# Altium PCB ADCS C2Sv0.1.PcbDoc (part 1 of 3)
Units mm, origin at the board's own origin, x right, y up, seen from the top; angles counter-clockwise.
Board outline 90 x 68 mm, 6 copper layers (SIG 1, GND 1, SIG 2, PWR, GND 2, SIG 3), stack 1.597 mm thick; 158 components, 104 nets, 588 pads, 339 vias.
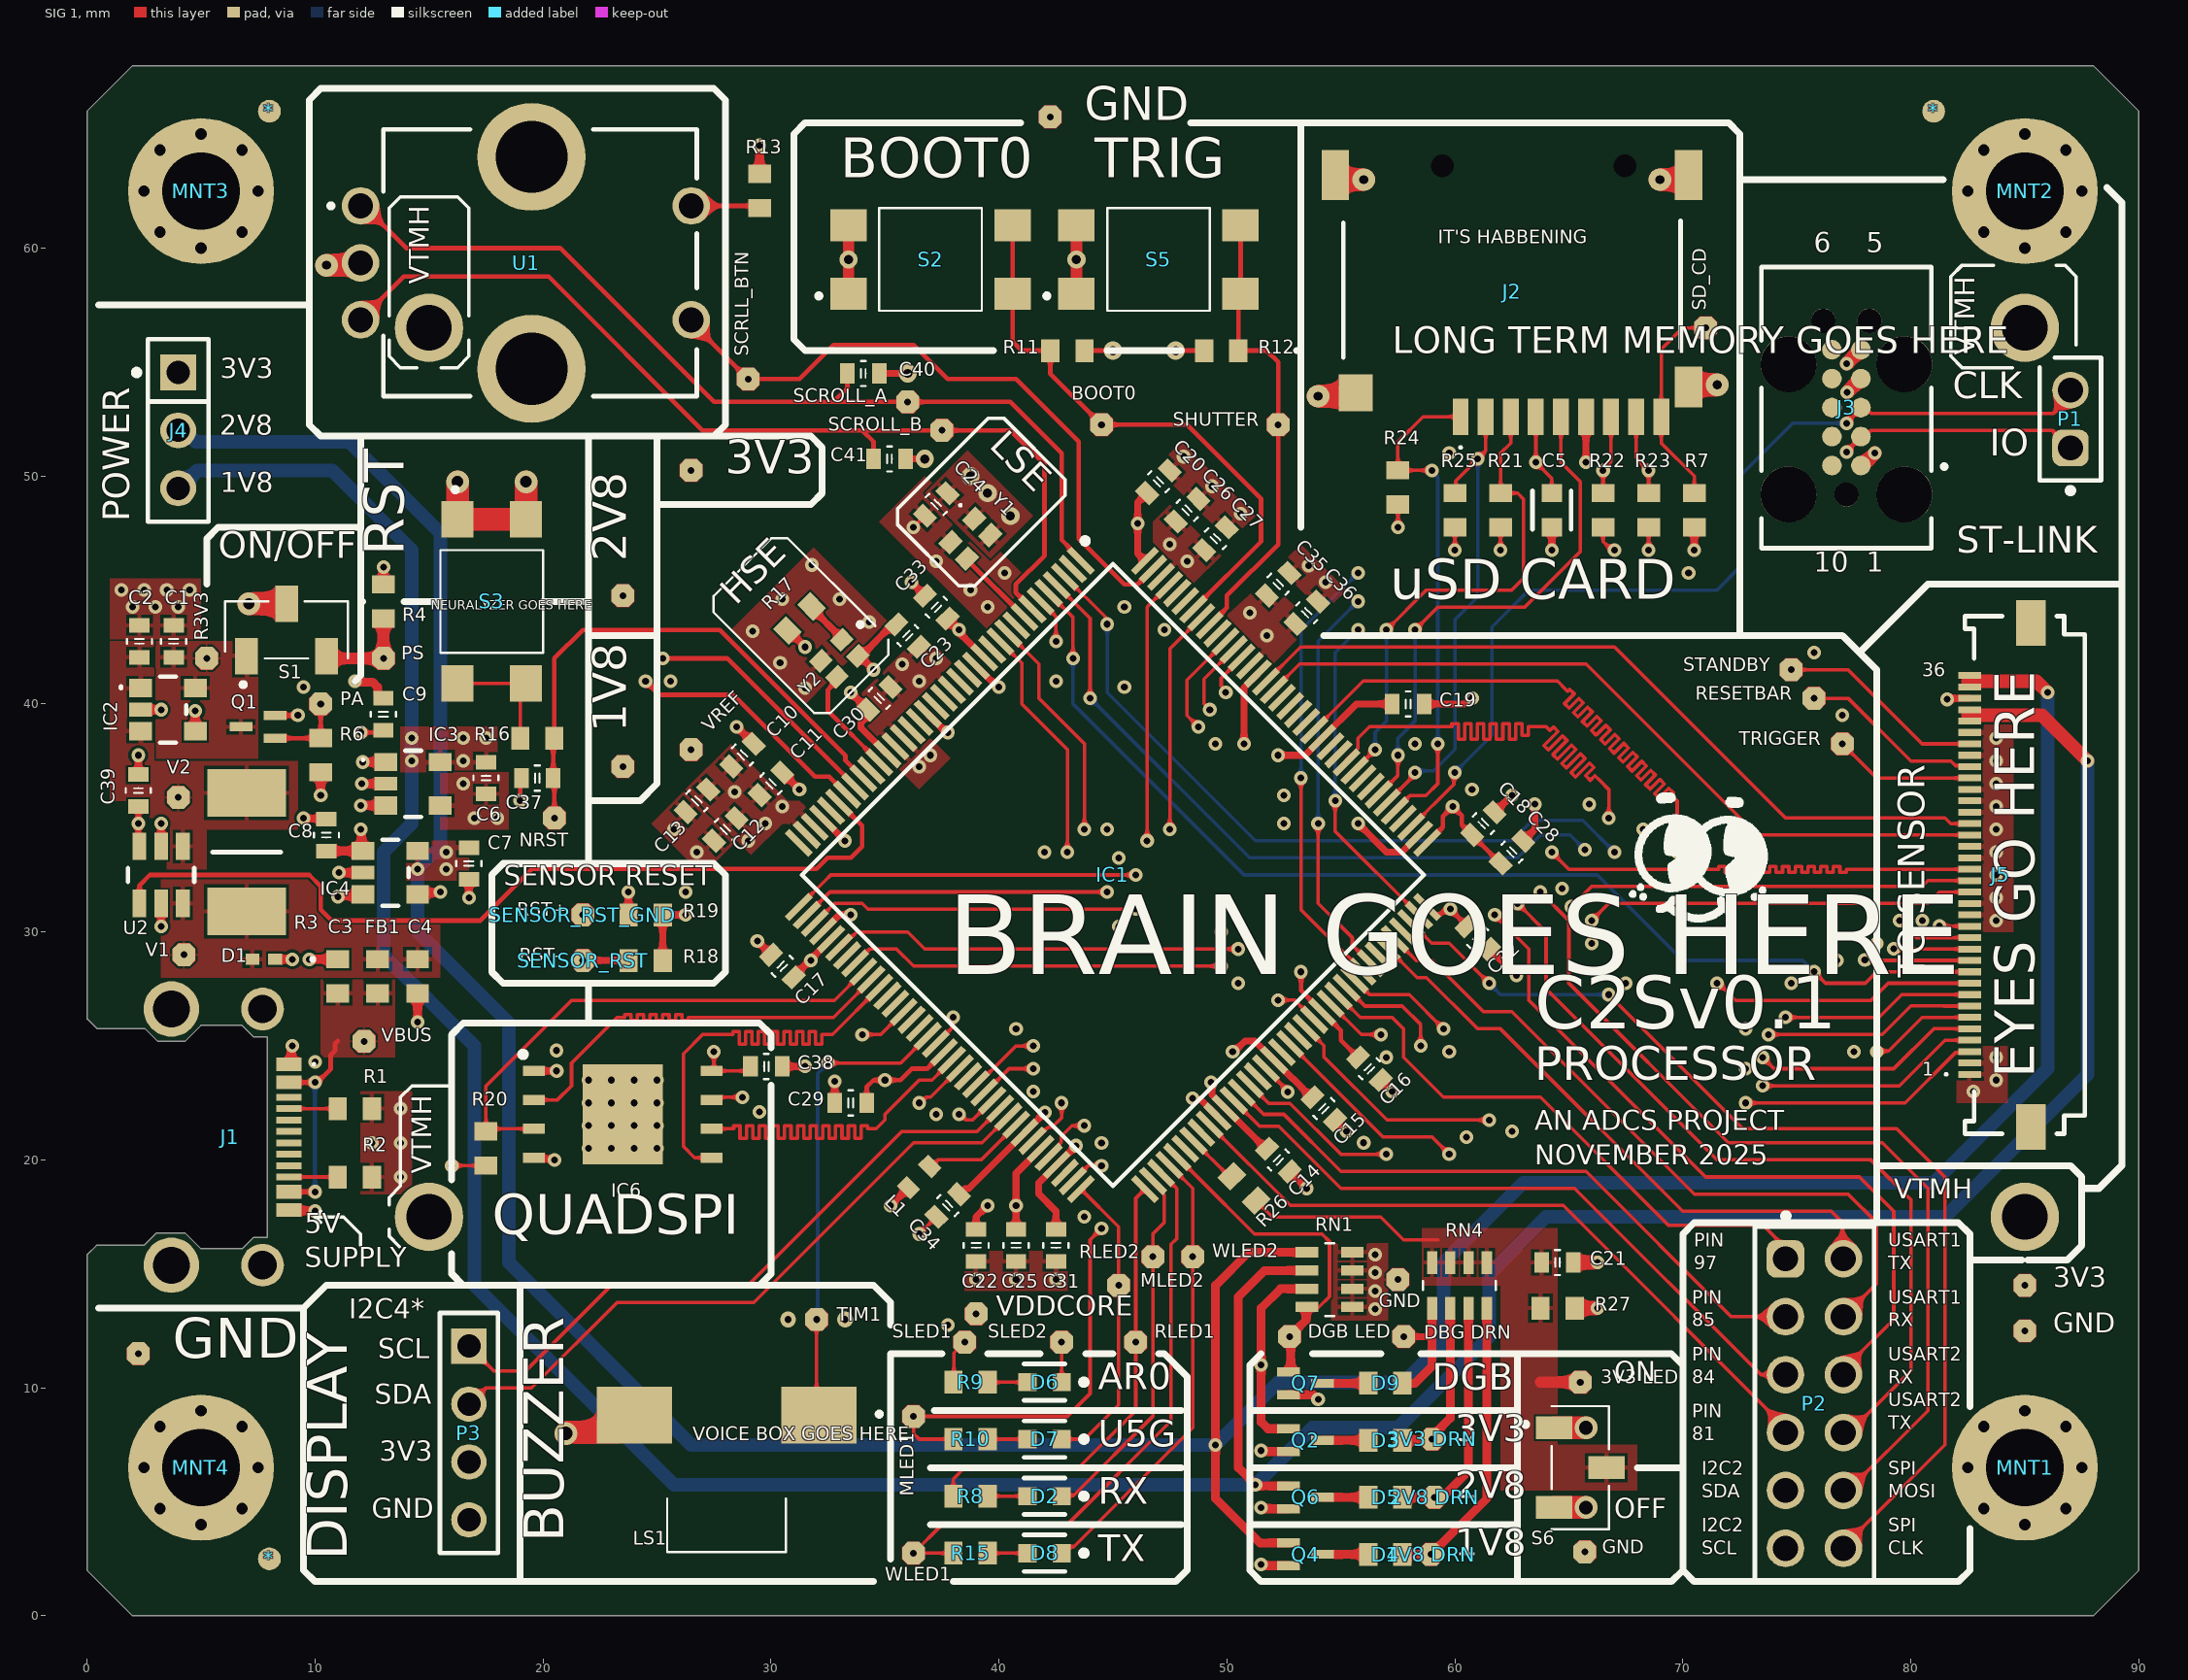
[diagram p0: SIG 1 view]
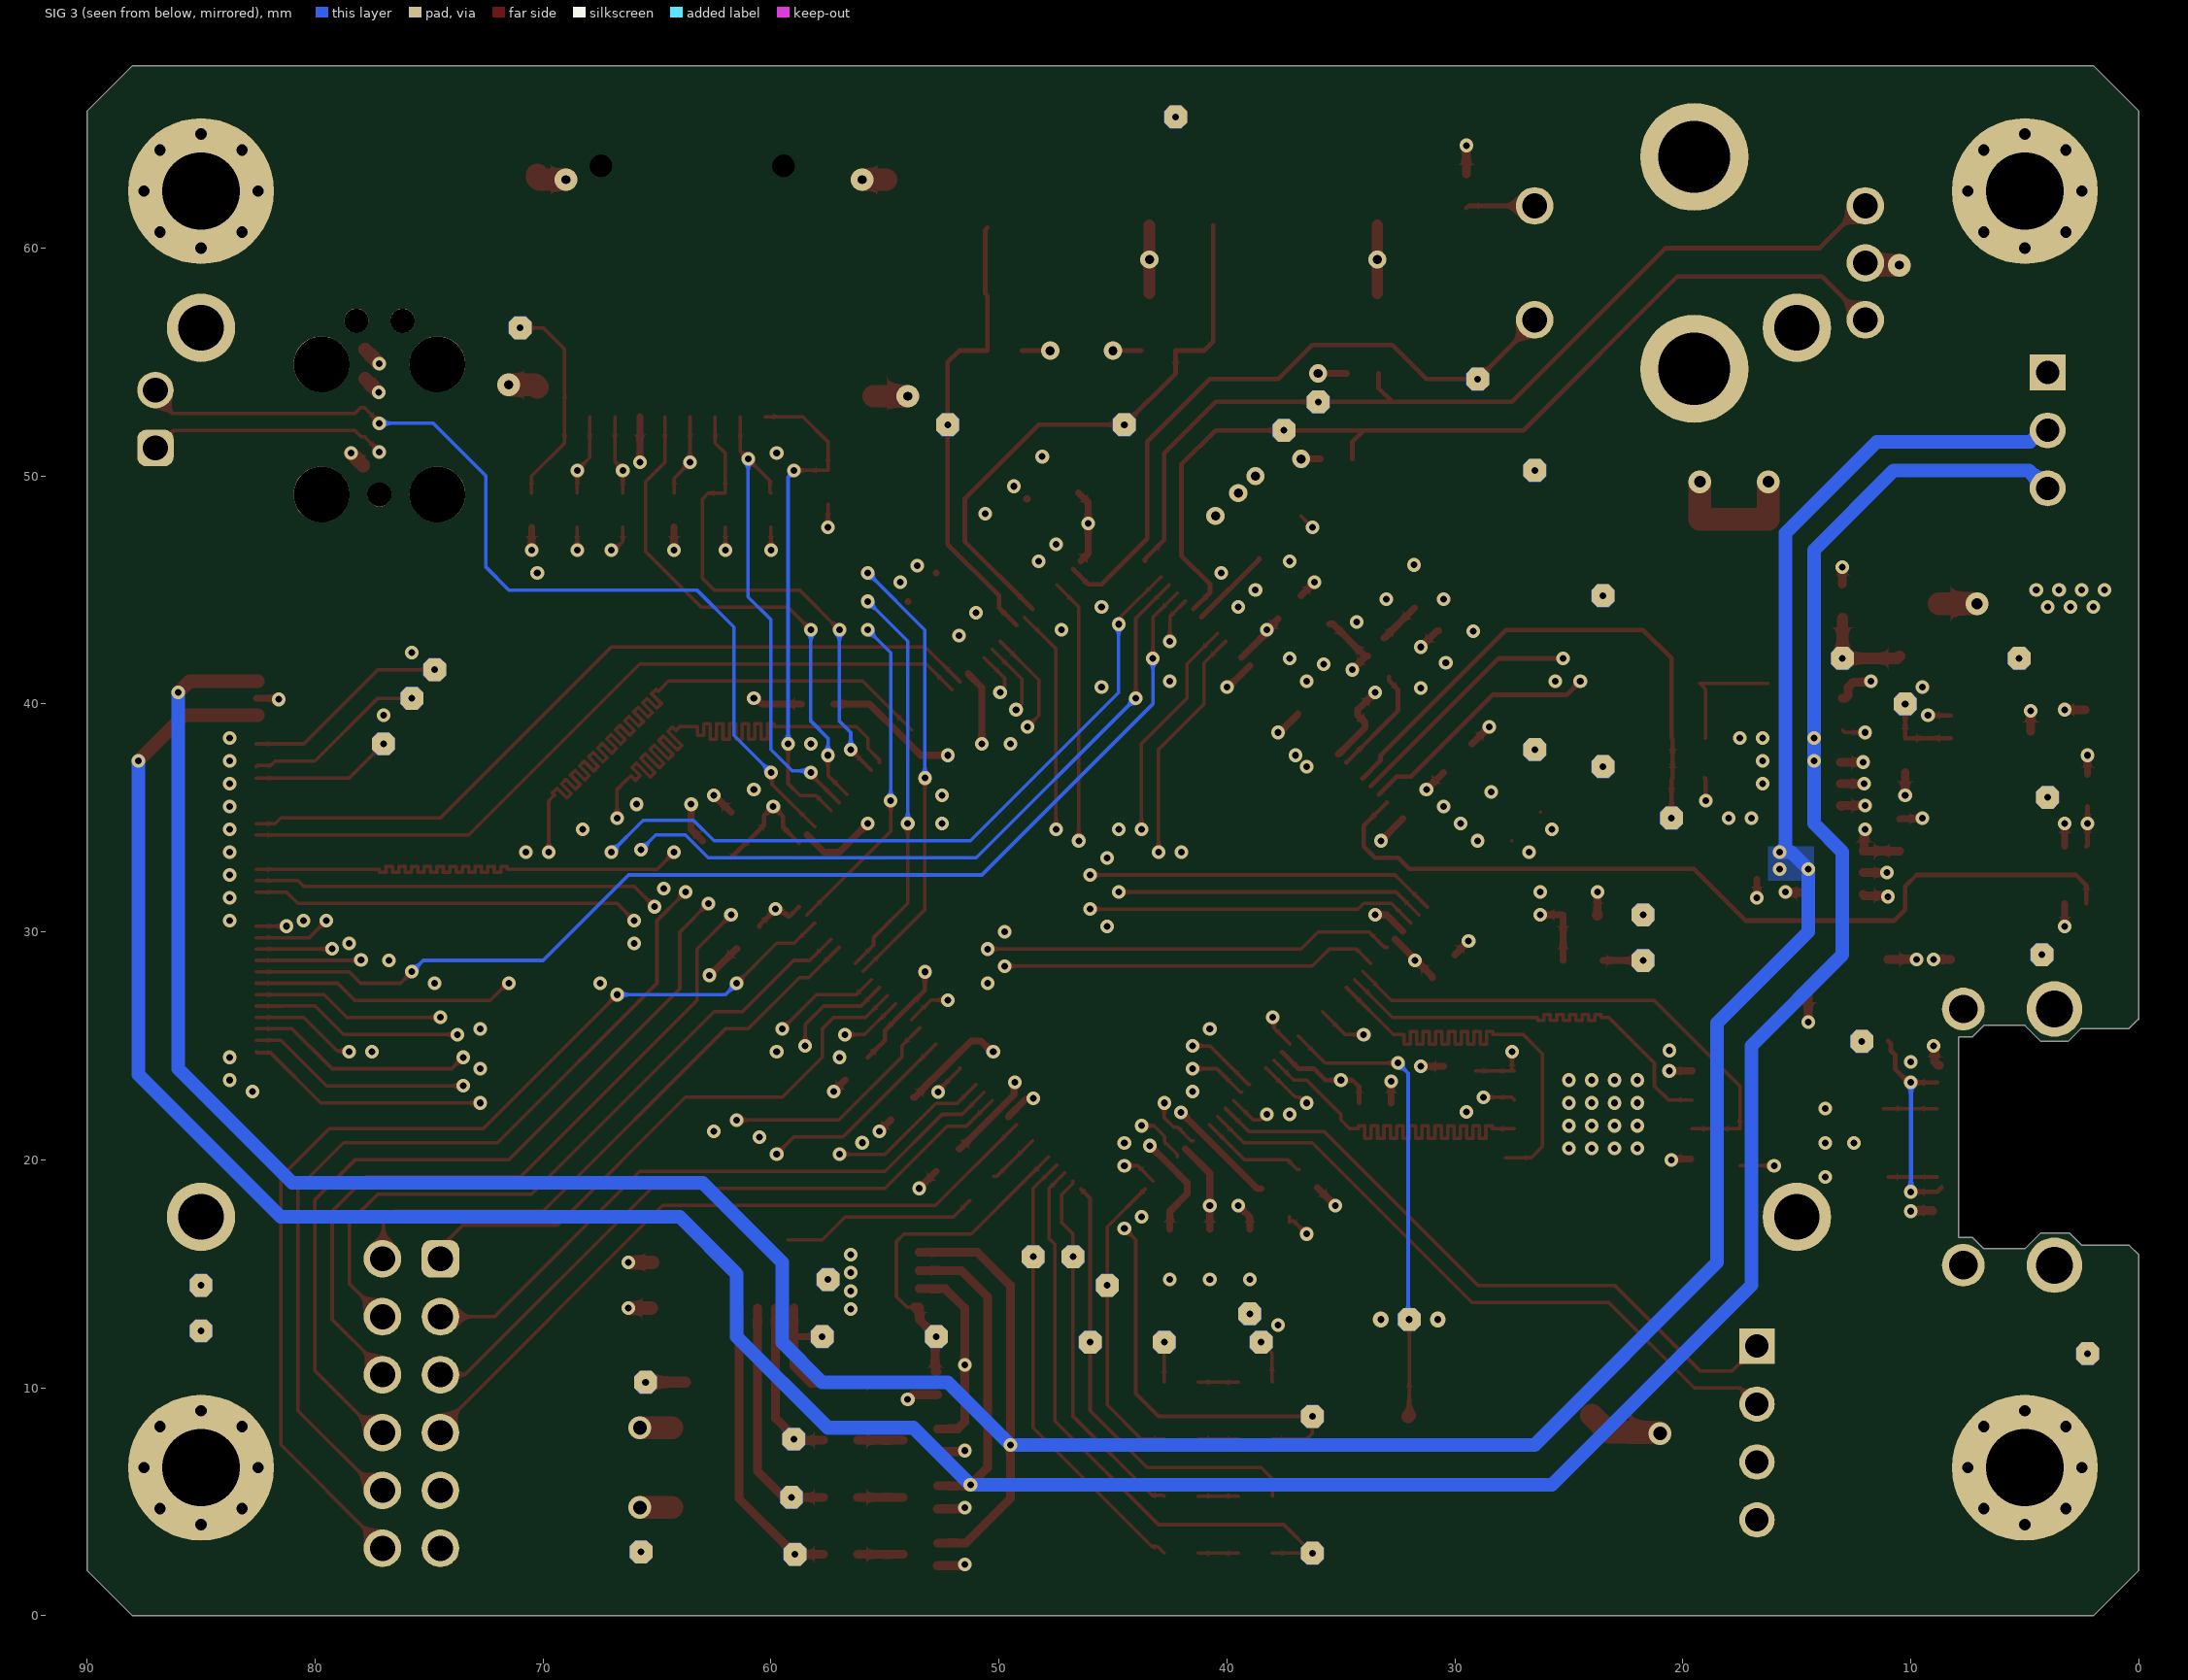
[diagram p1: SIG 3 view, seen from below]
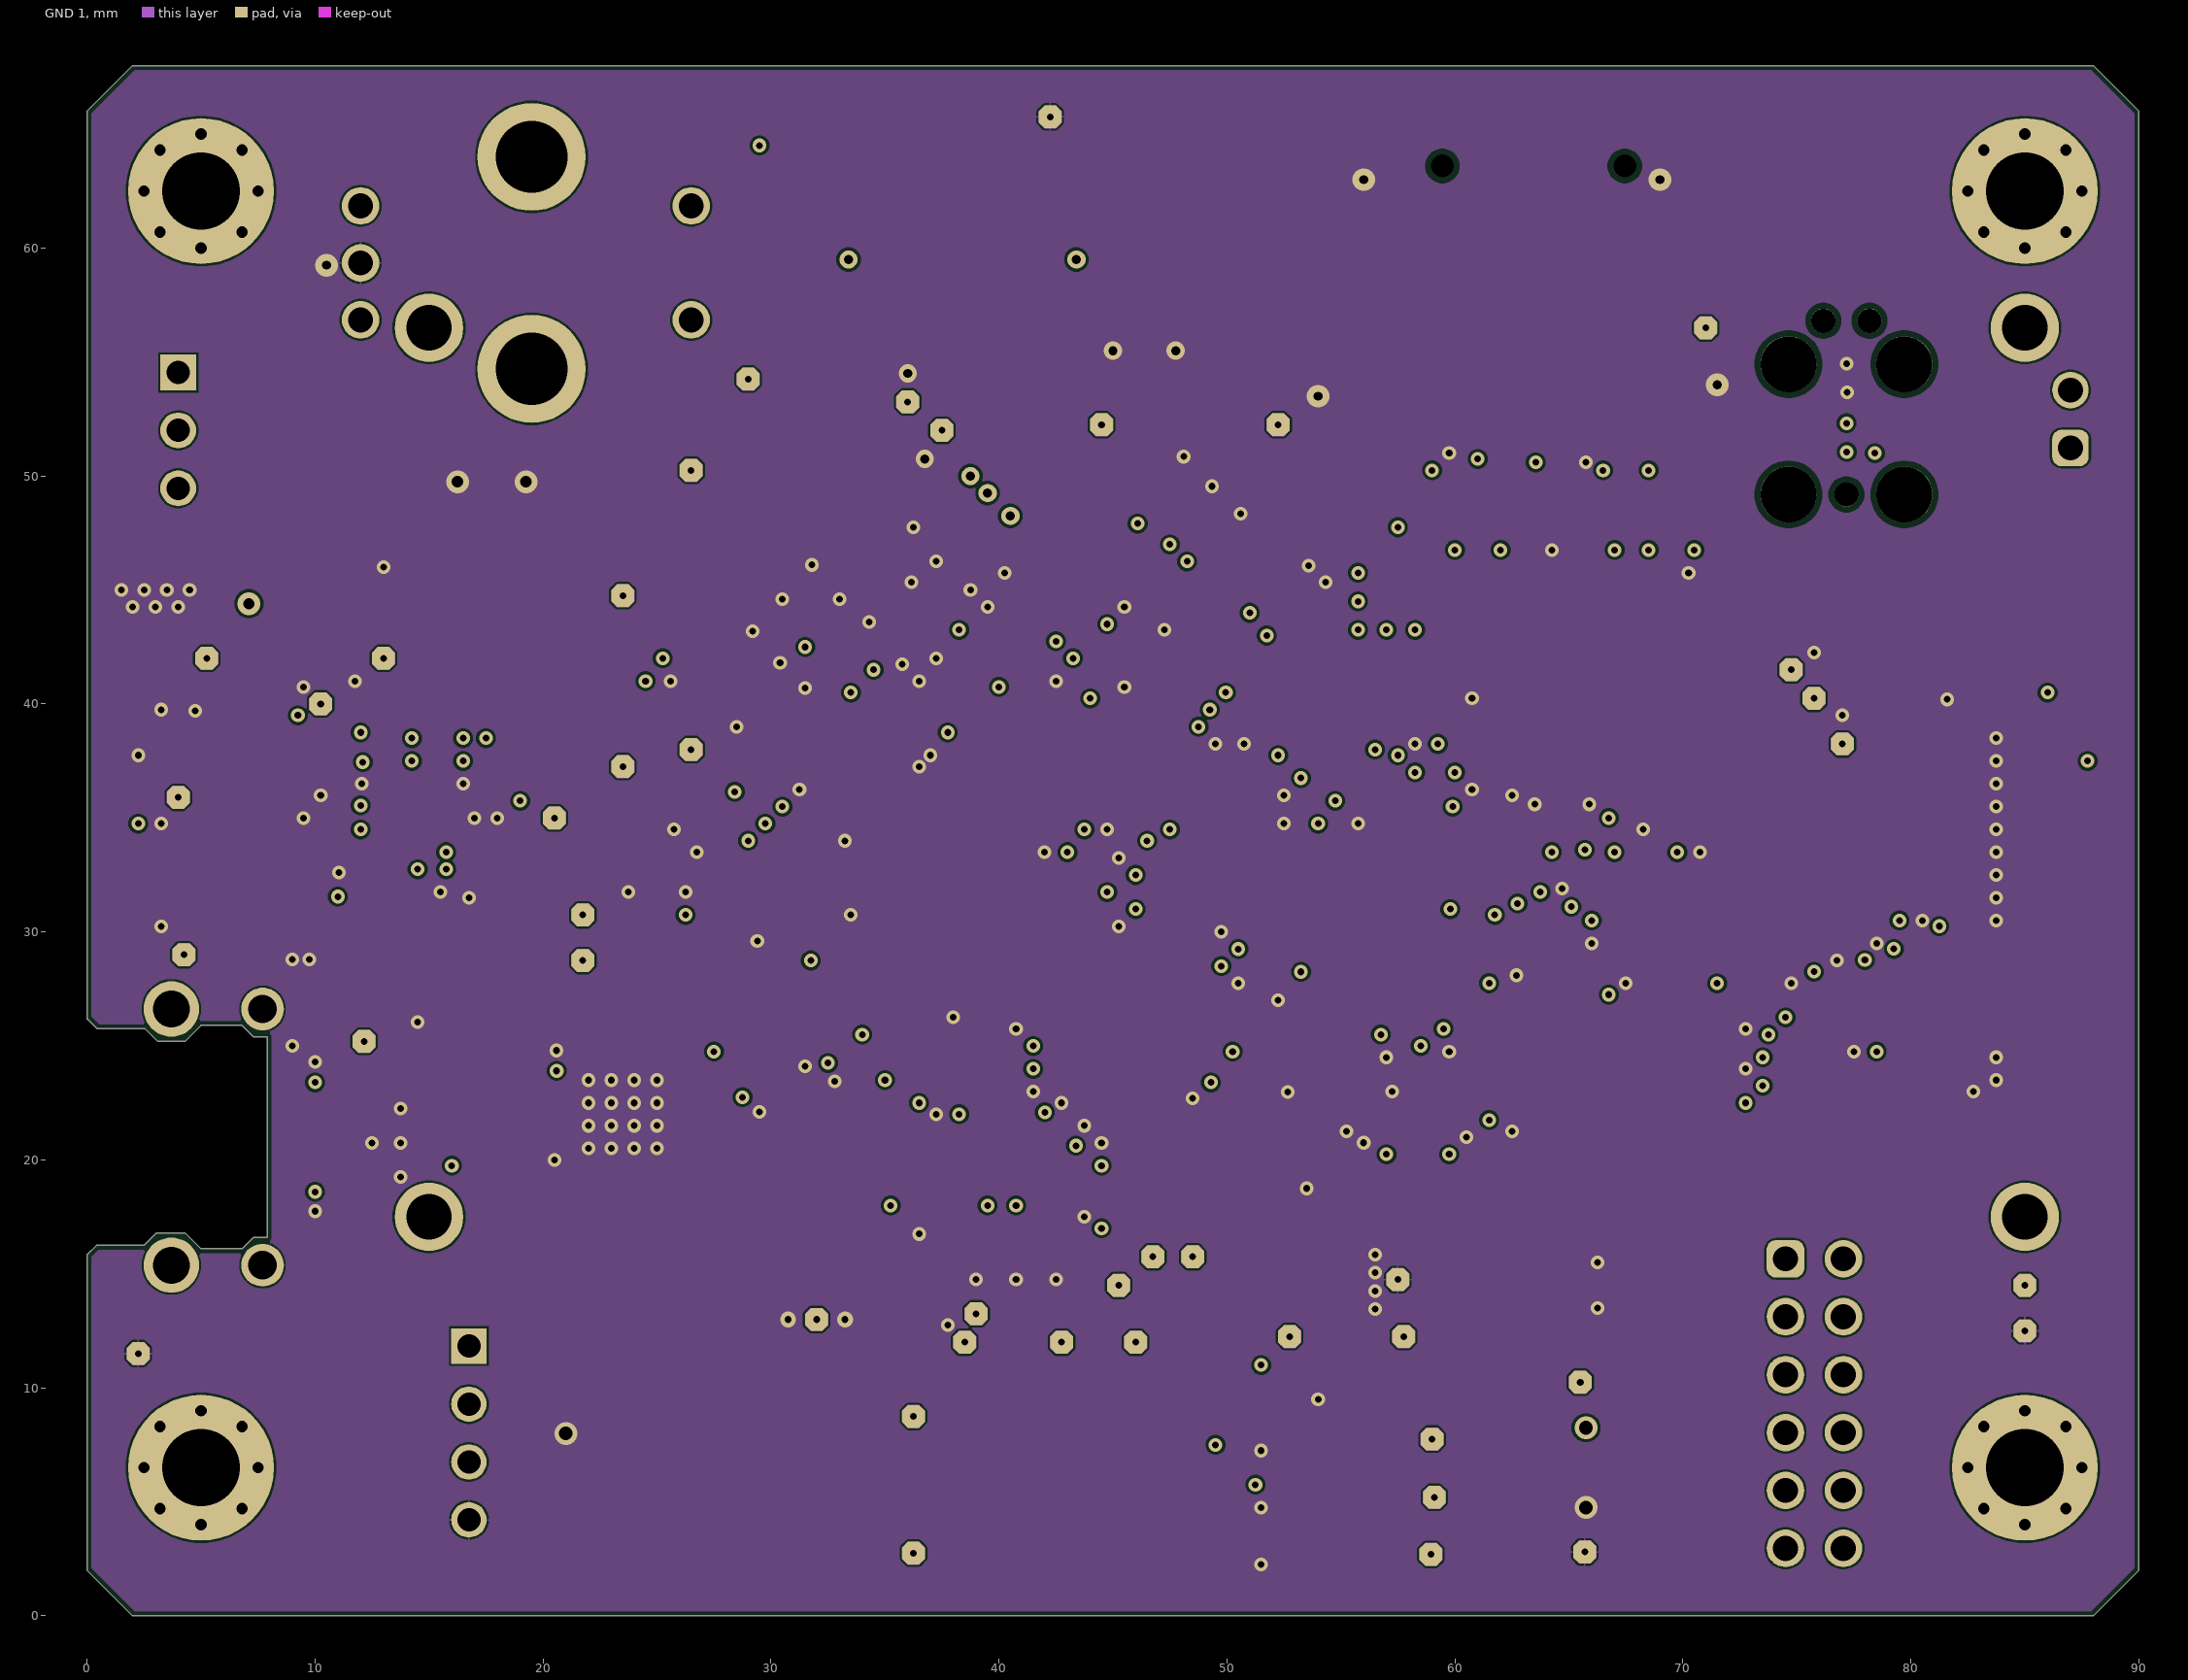
[diagram p2: GND 1]
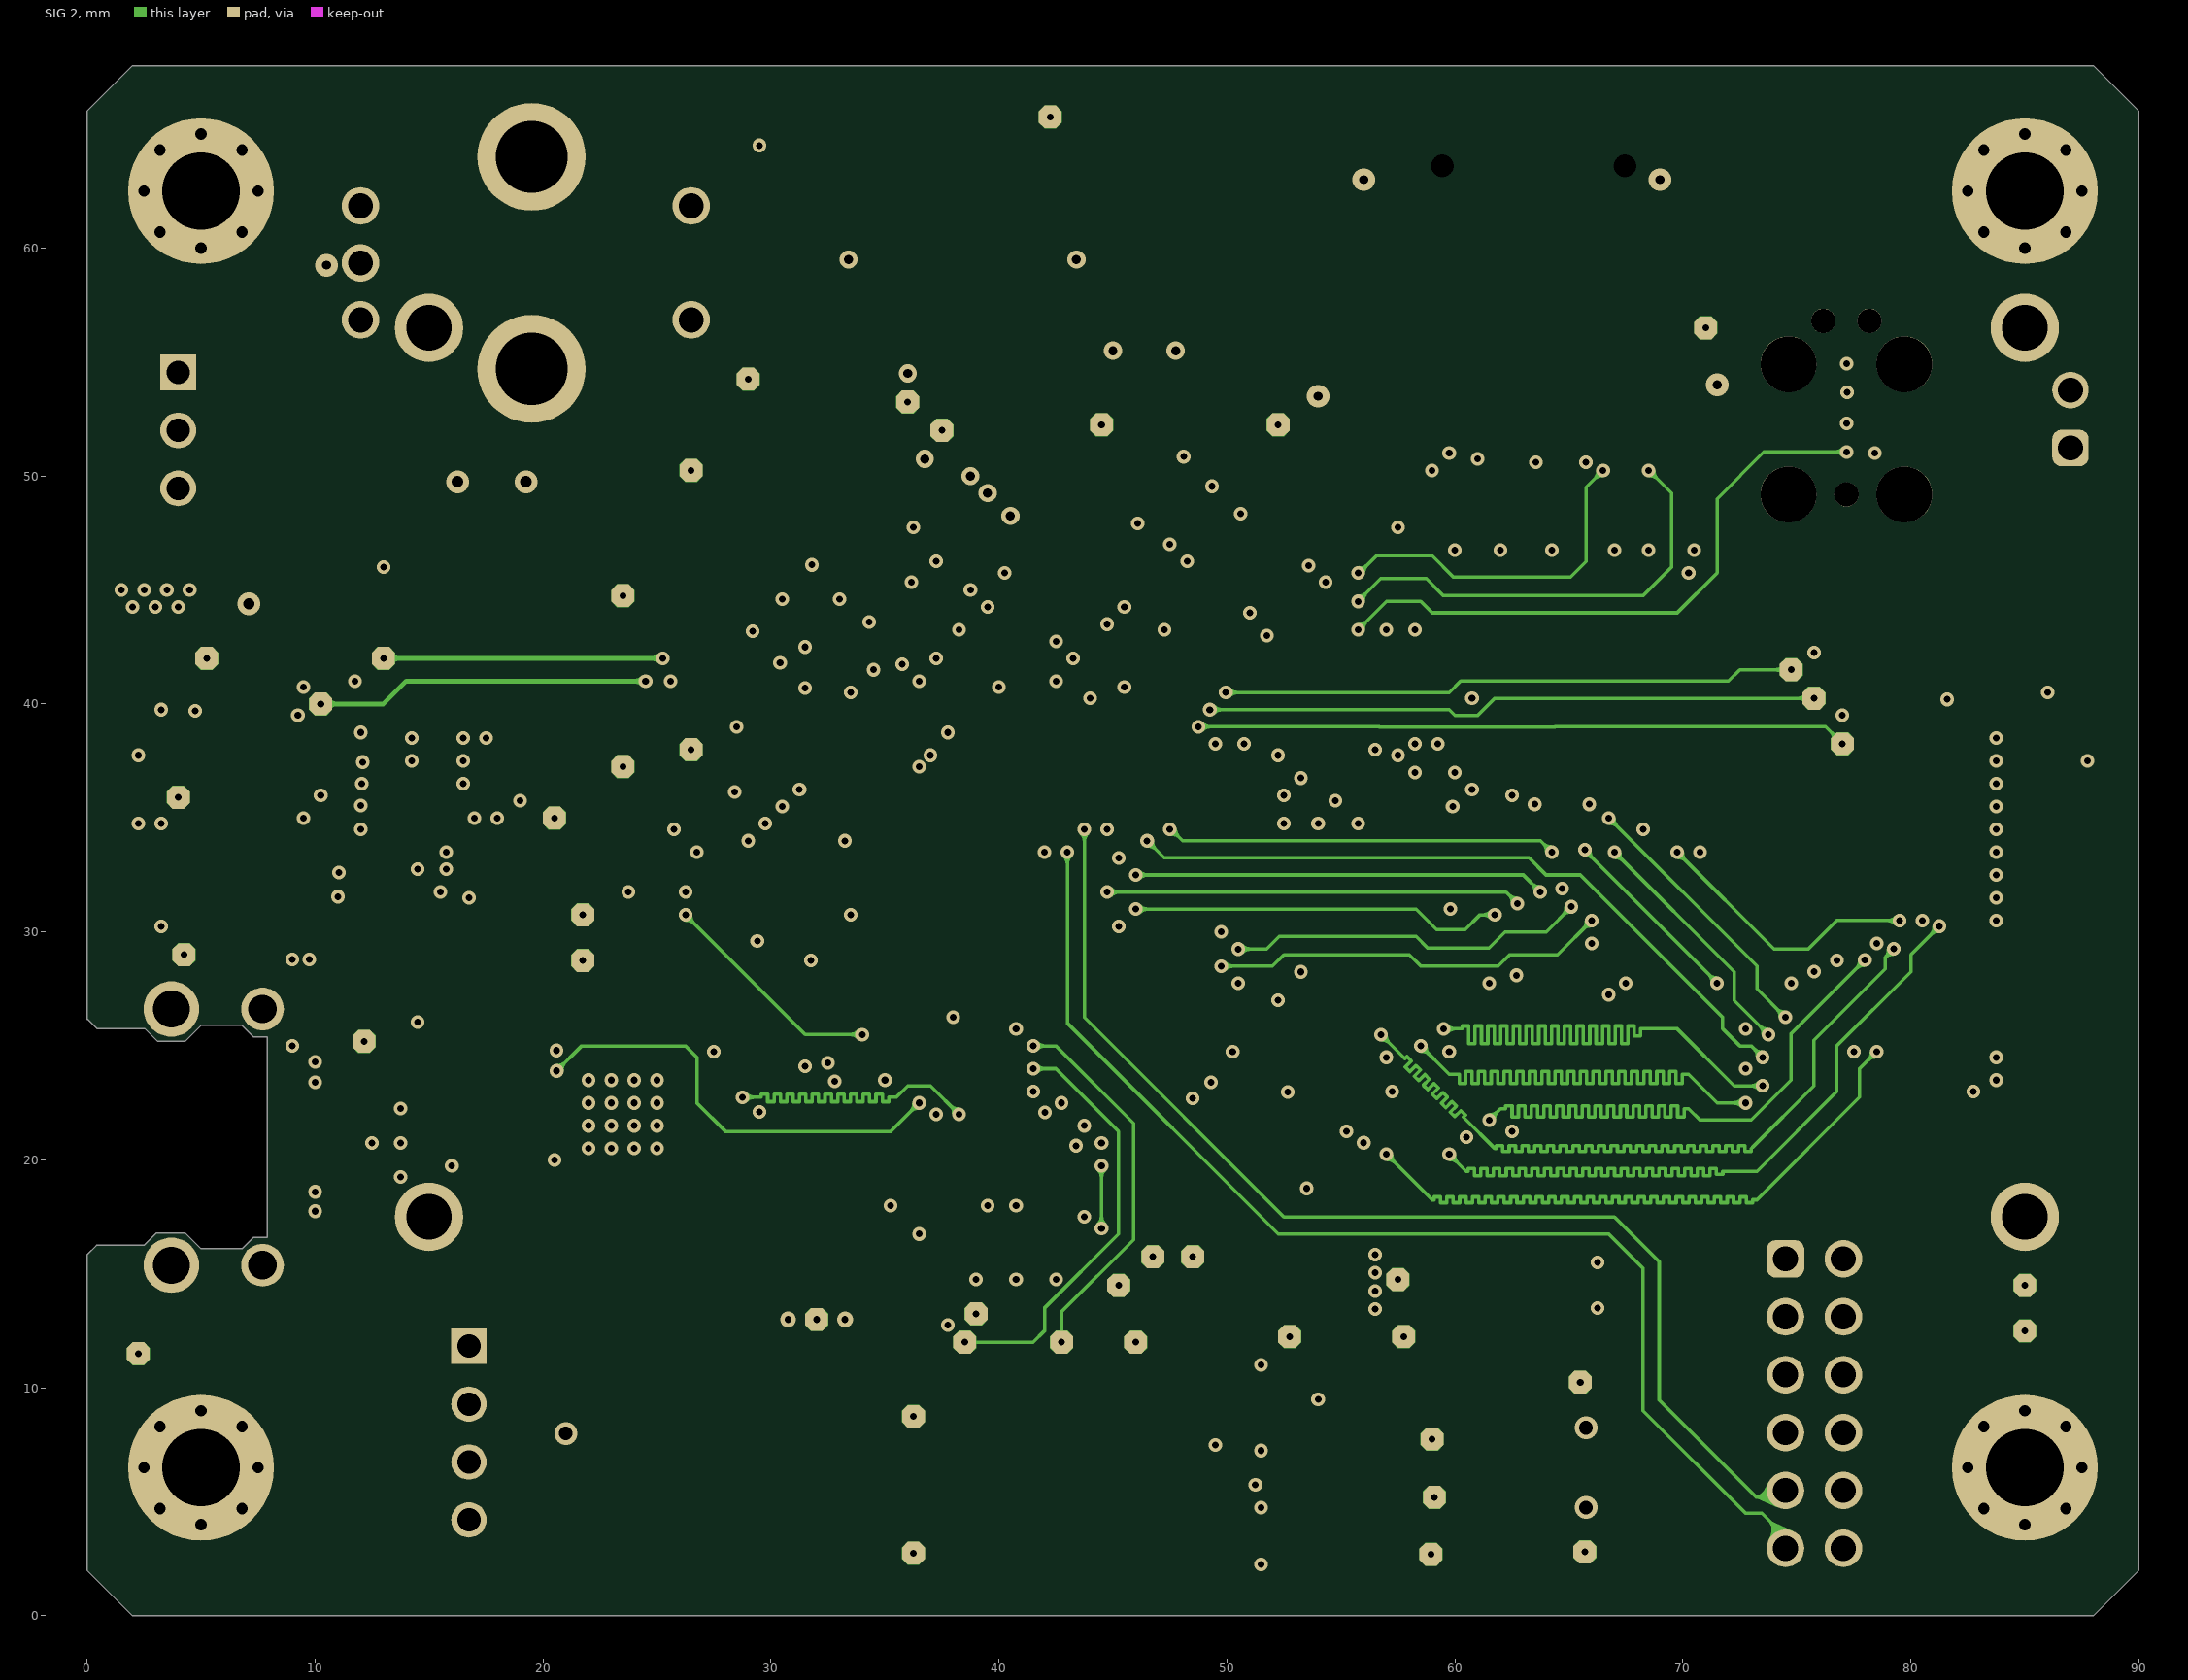
[diagram p3: SIG 2]
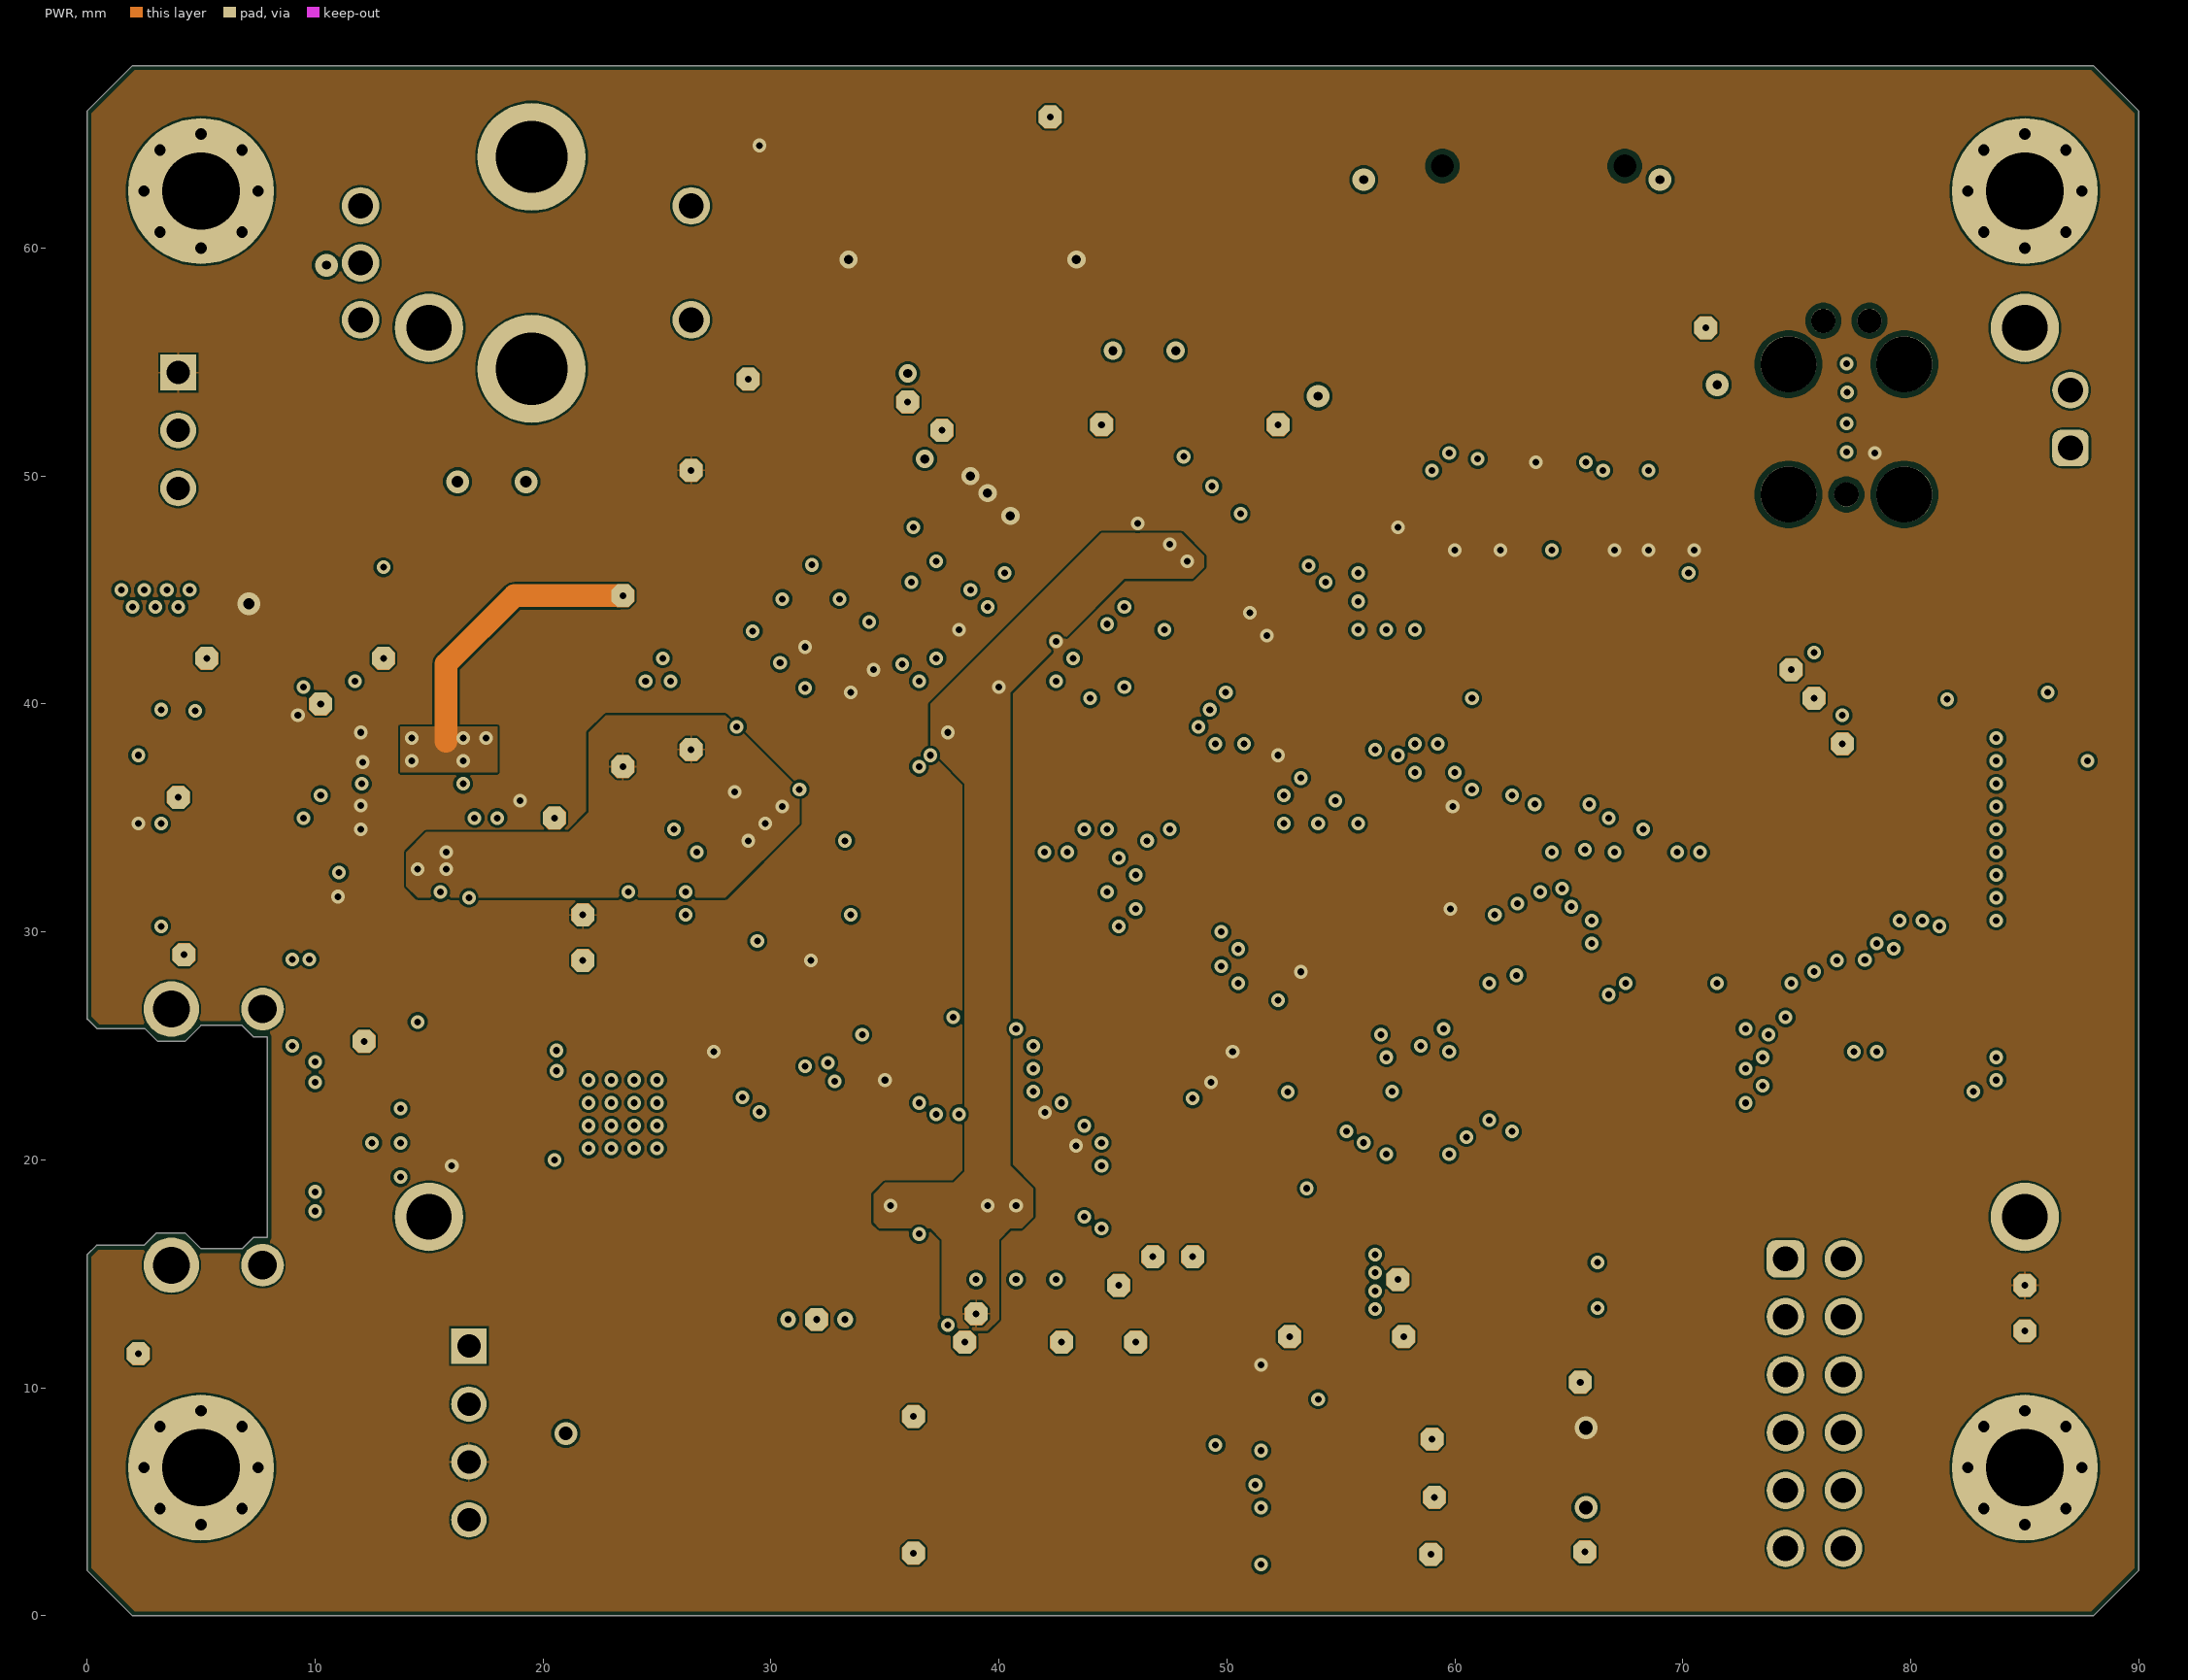
[diagram p4: PWR]
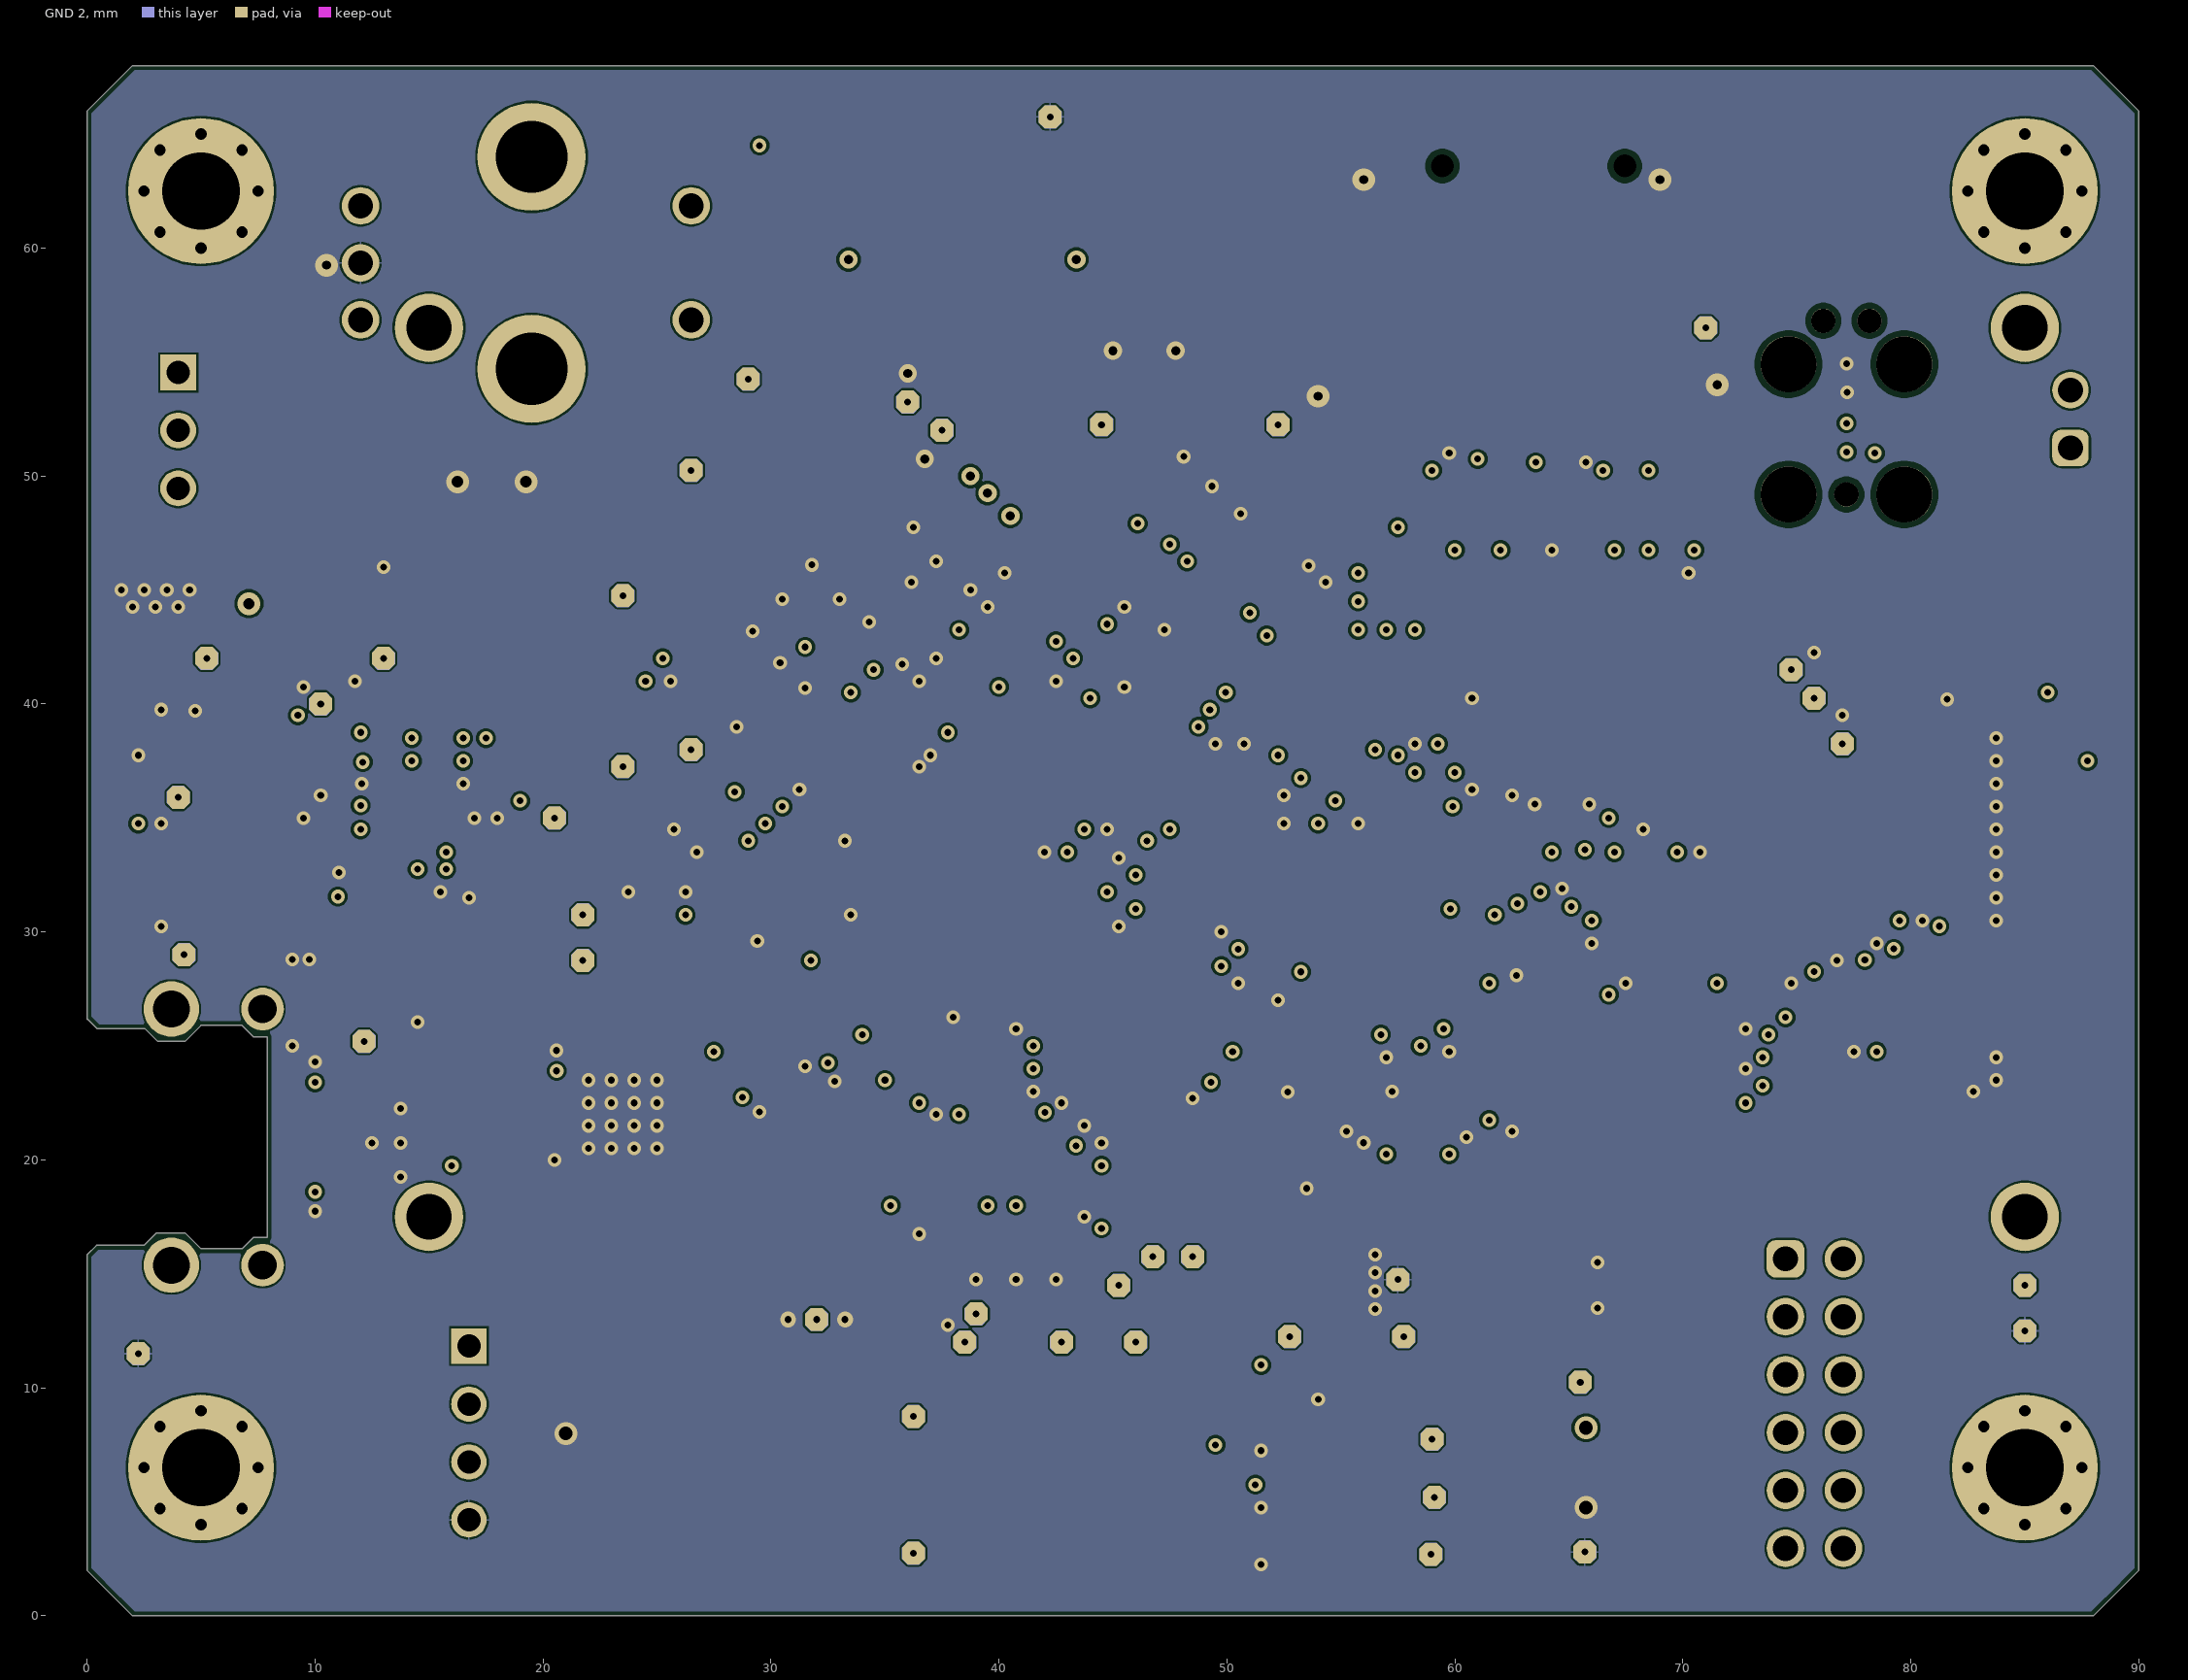
[diagram p5: GND 2]
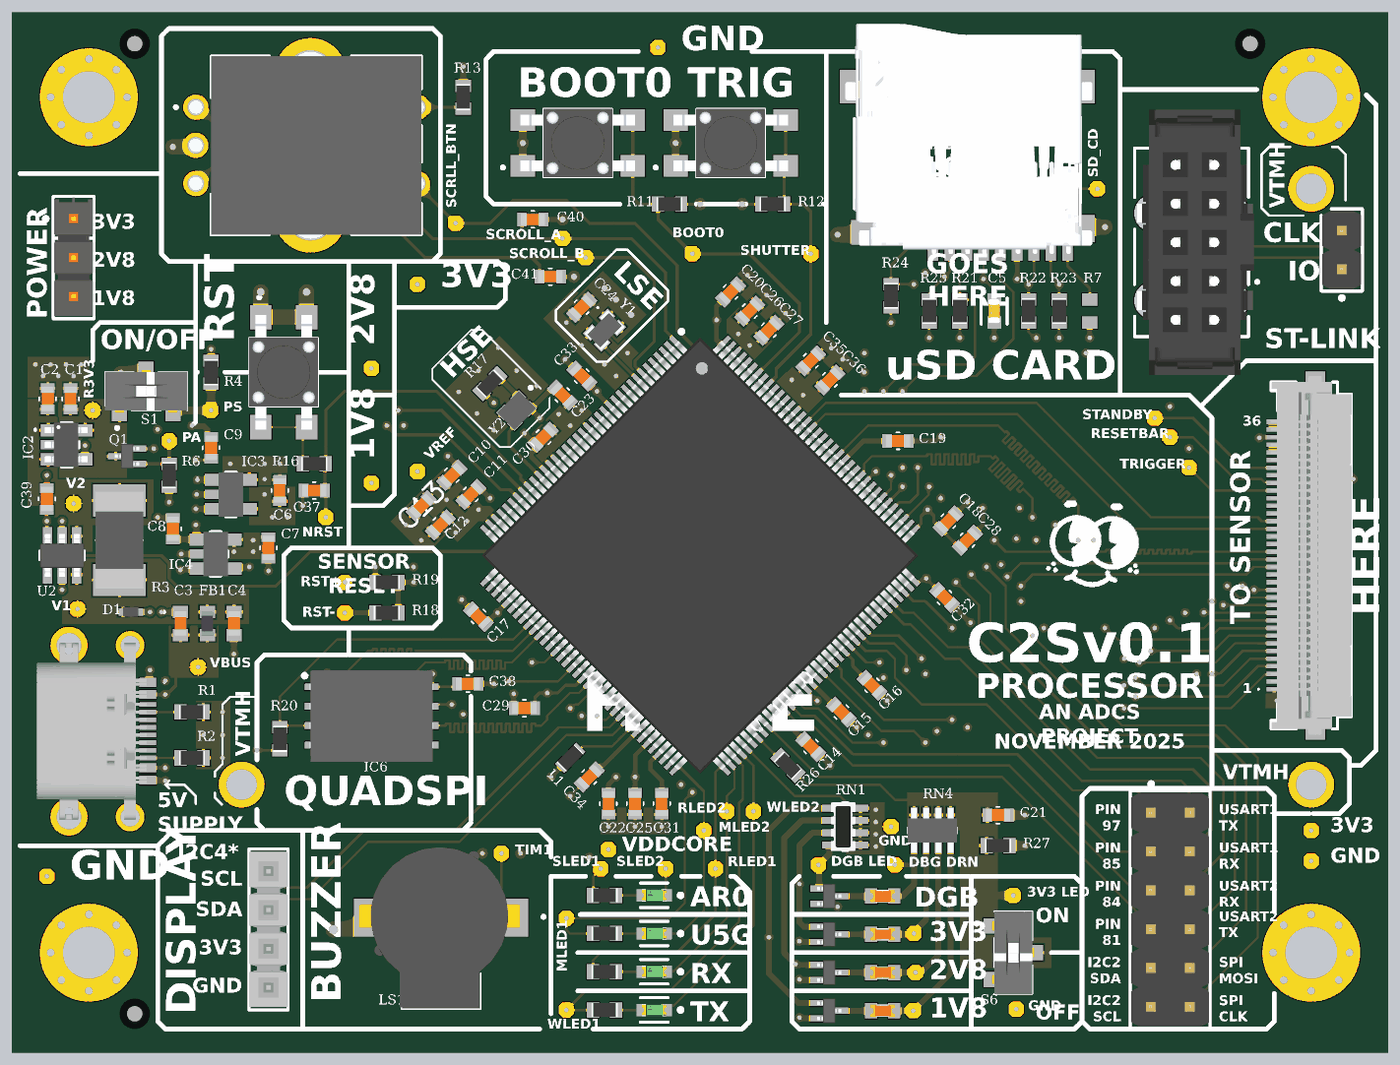
[diagram p7: 3D render of the assembled board from above, using the file's embedded part models]

## Layer stack, top to bottom
Top Solder: solder mask 0.0127, Solder Resist, Dk 3.8
SIG 1: signal copper 0.035
Dielectric 1: prepreg 0.1, 2313, Dk 4.05
GND 1: signal copper 0.0175
Core 1: core 0.565, FR-4, Dk 4.5
SIG 2: signal copper 0.0175
Dielectric 2: prepreg 0.127, 2116, Dk 4.25
PWR: signal copper 0.0175
Core 2: core 0.565, FR-4, Dk 4.5
GND 2: signal copper 0.0175
Dielectric 3: prepreg 0.1, 2313, Dk 4.05
SIG 3: signal copper 0.035
Bottom Solder: solder mask 0.0127, Solder Resist, Dk 3.8

## Board outline
2,0 0,2 0,15.829 0.421,16.25 2.2,16.25 2.5,16.25 3.05,16.8 4.3,16.8 5,16.1 6.8,16.1 7.3,16.6 7.9,16.6 7.9,25.4 7.3,25.4 6.8,25.9 5,25.9 4.3,25.2 3.1,25.2 2.55,25.75 0.45,25.75 0.029,26.171 0,26.171 0,66 2,68 88,68 90,66 90,2 88,0

## Design rules (kind name [scope] priority, off if disabled: settings)
BoardOutlineClearance [All] p1: gap=0.2 ignorepadtopadclearanceinfootprint=FALSE
Clearance [All] p1: gap=0.089 ignorepadtopadclearanceinfootprint=TRUE except(0.127: Arc-Via Track-Via SMDPad-Via THPad-Via Via-Via Via-Fill Via-Poly Via-Region Via-Text; 0.25: Arc-Hole Track-Hole SMDPad-Hole THPad-Hole Via-Hole Fill-Hole Poly-Hole Region-Hole Text-Hole)
ComponentClearance [All] p1: gap=0.089 collisioncheckmode=3 verticalgap=0.089 showdistances=TRUE
DiffPairsRouting [All] p1: maxlimit=0.089 minlimit=0.089 mostfreqgap=0.089 toplayer_minwidth=0.089 toplayer_maxwidth=1816.048 toplayer_prefwidth=0.089 midlayer1_minwidth=0.089 midlayer1_maxwidth=1816.048 midlayer1_prefwidth=0.089 midlayer2_minwidth=0.089 midlayer2_maxwidth=1816.048 midlayer2_prefwidth=0.089 midlayer3_minwidth=0.089 midlayer3_maxwidth=1816.048 midlayer3_prefwidth=0.089 midlayer4_minwidth=0.089 midlayer4_maxwidth=1816.048 midlayer4_prefwidth=0.089 bottomlayer_minwidth=0.089 bottomlayer_maxwidth=1816.048 bottomlayer_prefwidth=0.089 maxuncoupledlength=12.7
Height [All] p1: minheight=0 maxheight=1816.048 prefheight=12.7
HoleSize [All] p1: absolutevalues=TRUE maxlimit=6.3 minlimit=0.2 maxpercent=80.000 minpercent=20.000
HoleToHoleClearance [All] p1: gap=0.25 allowstackedmicrovias=FALSE
MatchedLengths DCMI [InNetClass('DCMI')] p1: tolerance=5 checknetsindiffpair=FALSE checkdiffpairvsdiffpair=TRUE checkxsignals=TRUE checkothers=TRUE
MatchedLengths QSPI [InNetClass('QSPI')] p2 off: tolerance=25.4 checknetsindiffpair=FALSE checkdiffpairvsdiffpair=TRUE checkxsignals=TRUE checkothers=TRUE usedelayunits=TRUE delaytolerance=50.000000
MatchedLengths "QSPI 50" [InNetClass('OSPI 50ps')] p3 off: tolerance=25.4 checknetsindiffpair=FALSE checkdiffpairvsdiffpair=TRUE checkxsignals=TRUE checkothers=TRUE usedelayunits=TRUE delaytolerance=50.000000
MinimumAnnularRing [All] p1: minimumring=0.075
MinimumSolderMaskSliver [All] p1: minsoldermaskwidth=0.049
PlaneClearance [All] p1: clearance=0.089
PlaneConnect PlaneConnectPowerPads [InPadClass('PowerPads')] p1: planeconnectstyle=Direct reliefexpansion=0.508 reliefentries=4 reliefconductorwidth=0.254 reliefairgap=0.254
PlaneConnect [All] p2: pad.planeconnectstyle=Relief pad.reliefexpansion=0.3 pad.reliefentries=4 pad.reliefconductorwidth=0.089 pad.reliefairgap=0.089 via.planeconnectstyle=Direct via.reliefexpansion=0.3 via.reliefentries=4 via.reliefconductorwidth=0.127 via.reliefairgap=0.127
PolygonConnect PolygonConnectPowerPads [All vs (InPadClass('PowerPads'))] p1: connectstyle=Direct reliefconductorwidth=0.254 reliefentries=4 polygonreliefangle="90 Angle" airgapwidth=0.254
PolygonConnect [All] p2: thpad.connectstyle=Relief thpad.reliefconductorwidth=0.089 thpad.reliefentries=4 thpad.polygonreliefangle="90 Angle" thpad.airgapwidth=0.089 smdpad.connectstyle=Relief smdpad.reliefconductorwidth=0.2 smdpad.reliefentries=4 smdpad.polygonreliefangle="90 Angle" smdpad.airgapwidth=0.127 via.connectstyle=Direct via.reliefconductorwidth=0.127 via.reliefentries=4 via.polygonreliefangle="90 Angle" via.airgapwidth=0.127
RoutingVias [All] p1: holewidth=0.2 width=0.45 viastyle="Through Hole" minholewidth=0.2 minwidth=0.45 maxholewidth=6.3 maxwidth=6.55
SilkToSilkClearance [All] p1: silktosilkclearance=0
SilkToSolderMaskClearance [IsPad] p1: minsilkscreentomaskgap=0.18 clearancetoexposedcopper=FALSE
SolderMaskExpansion Via [IsVia] p1: expansion=0.102 istentingtop=TRUE
SolderMaskExpansion [All] p2: expansion=0.075 istentingtop=FALSE
SupplyNets "Schematic Supply Nets_7" [InNet('3V3')] p1: voltage=0.000
SupplyNets "Schematic Supply Nets_6" [InNet('1V8')] p2: voltage=0.000
SupplyNets "Schematic Supply Nets_5" [InNet('3V3 LED')] p3: voltage=0.000
SupplyNets "Schematic Supply Nets_4" [InNet('VDDCORE')] p4: voltage=0.000
SupplyNets "Schematic Supply Nets_3" [InNet('GND')] p5: voltage=0.000
SupplyNets "Schematic Supply Nets_2" [InNet('2V8')] p6: voltage=0.000
SupplyNets "Schematic Supply Nets_1" [InNet('R3V3')] p7: voltage=0.000
SupplyNets "Schematic Supply Nets" [InNet('VBUS')] p8: voltage=0.000
Width [All] p1: maxlimit=1816.048 minlimit=0.089 preferedwidth=0.089
20 further rules are at their usual default settings.

## Classes and differential pairs
component class U_uSD: C5 J2 R7 R21 R22 R23 R24 R25 SD_CD
component class U_USB-C: C1 C2 C3 C4 C39 D1 FB1 GND IC2 J1 PA PS Q1 R1 R2 R3 R3V3 R4 R6 S1 U2 V1 V2 VBUS
component class U_TAG: J3 P1
component class U_Memory: C38 IC6 R20
component class U_MCU: "1V8 DRN" "2V8 DRN" 3V3 "3V3 DRN" "3V3 LED" 45 BOOT0 C10 C11 C12 C13 C14 C15 C16 C17 C18 C19 C20 C21 C22 C23 C24 C25 C26 C27 C28 C29 C30 C31 C32 C33 C34 C35 C36 C37 C40 C41 D2 D3 D4 D5 D6 D7 D8 D9 "DBG DRN" "DGB LED" GND IC1 L1 MLED1 MLED2 NRST P3 Q2 Q4 Q6 Q7 R8 R9 R10 R11 R12 R13 R15 R16 R17 R18 R19 R26 R27 RLED1 RLED2 RN1 RN4 S2 S3 S5 S6 SCRLL_BTN SCROLL_A SCROLL_B SENSOR_RST SENSOR_RST_GND SHUTTER SLED1 SLED2 U1 VDDCORE VREF WLED1 WLED2 Y1 Y2
component class U_LPS: 1V8 2V8 C6 C7 C8 C9 IC3 IC4 J4
component class "ADCS C2Sv0.1_TopLevel": * g J5 LS1 MNT1 MNT2 MNT3 MNT4 P2 RESETBAR STANDBY TIM1 TRIGGER

## Components (designator, comment, footprint, x,y, rotation, side; value= is the part's Value field where it differs from the comment)
1V8 "TP_2MM" "TESTPOINT 2MM" 23.5,37.25 r0 top
"1V8 DRN" "TP_2MM" "TESTPOINT 2MM" 58.95,2.7 r90 top
2V8 "TP_2MM" "TESTPOINT 2MM" 23.5,44.75 r0 top
"2V8 DRN" "TP_2MM" "TESTPOINT 2MM" 59.1,5.2 r90 top
3V3 "TP_2MM" "TESTPOINT 2MM" 26.5,50.25 r0 top
3V3 "TP_2MM" "TESTPOINT 2MM" 85,14.5 r0 top
"3V3 DRN" "TP_2MM" "TESTPOINT 2MM" 59,7.75 r90 top
"3V3 LED" "TP_2MM" "TESTPOINT 2MM" 65.5,10.25 r90 top
* "Fid Mark" "Fid Marker"#1 81,65 r90 top
* "Fid Mark" "Fid Marker"#2 7.5,2.5 r90 top
* "Fid Mark" "Fid Marker"#3 8,66 r90 top
BOOT0 "TP_2MM" "TESTPOINT 2MM" 44.5,52.25 r90 top
C1 "MCD-00237" C0603 3.8,42.75 r90 top value=1uF
C2 "MCD-00237" C0603 2.3,42.75 r270 top value=0.1uF
C3 "CAP_0603_16V" CAP_0603 11,28.05 r270 top
C4 "CAP_0603_16V" CAP_0603 14.5,28.05 r90 top
C5 "CC0603KRX7R9BB103" FP-CC0603-DA-MFG 64.25,48.5 r270 top value="10 nF"
C6 "MCD-00237" C0603 17.5,36.75 r270 top value=1uF
C7 "MCD-00237" C0603 16.75,33 r270 top value=1uF
C8 "MCD-00237" C0603 10.5,34.25 r270 top value=0.1uF
C9 "MCD-00237" C0603 13,39.55 r270 top value=0.1uF
C10 "MCD-00237" C0603 28.755,37.755 r45 top value=100nF
C11 "MCD-00237" C0603 30,36.5 r45 top value=1uF
C12 "MCD-00237" C0603 28,34.5 r225 top value=100nF
C13 "MCD-00237" C0603 26.75,35.75 r225 top value=1uF
C14 "MCD-00237" C0603 52.255,19.995 r315 top value=100nF
C15 "MCD-00237" C0603 54.25,22.25 r315 top value=100nF
C16 "MCD-00237" C0603 56.25,24 r315 top value=100nF
C17 "MCD-00237" C0603 30.5,28.5 r135 top value=100nF
C18 "MCD-00237" C0603 61.25,34.75 r45 top value=100nF
C19 "MCD-00237" C0603 57.95,40 r0 top value=100nF
C20 "MCD-00237" C0603 47,49.75 r45 top value=100nF
C21 "MCD-00237" C0603 64.5,15.5 r180 top value=2.2uF
C22 "MCD-00237" C0603 39,16.25 r270 top value=100nF
C23 "MCD-00237" C0603 36,43 r135 top value=4.7uF
C24 "MCD-00237" C0603 37.25,48.75 r225 top value=4.7uF
C25 "MCD-00237" C0603 40.75,16.25 r270 top value=2.2uF
C26 "MCD-00237" C0603 48.25,48.5 r45 top value=2.2uF
C27 "MCD-00237" C0603 49.5,47.25 r45 top value=100nF
C28 "MCD-00237" C0603 62.5,33.5 r45 top value=100nF
C29 "MCD-00237" C0603 33.5,22.5 r180 top value=100nF
C30 "MCD-00237" C0603 34.75,40.25 r45 top value=100nF
C31 "MCD-00237" C0603 42.5,16.25 r270 top value=10uF
C32 "MCD-00237" C0603 61,29.75 r315 top value=100nF
C33 "MCD-00237" C0603 37.255,44.245 r135 top value=100nF
C34 "MCD-00237" C0603 37.75,18 r225 top value=10uF
C35 "MCD-00237" C0603 52.25,45.25 r45 top value=100nF
C36 "MCD-00237" C0603 53.5,44 r45 top value=4.7uF
C37 "MCD-00237" C0603 19.75,36.75 r0 top value=100nF
C38 "MCD-00237" C0603 29.8,24.1 r0 top value=100nF
C39 "MCD-00237" C0603 2.25,36.2 r90 top value=0.1uF
C40 "MCD-00237" C0603 34.05,54.5 r0 top value=100nF
C41 "MCD-00237" C0603 35.2,50.75 r0 top value=100nF
D1 "TPD1E10B06DPYR" TPD1E10B06DPYR 7.75,28.8 r180 top
D2 "VLMG1300-GS08" FP-6_541-5092_01-4-MFG 42,5.25 r180 top
D3 "LED_0603_RED" LED_0603_RED 56.95,7.7 r0 top
D4 "LED_0603_RED" LED_0603_RED 56.95,2.7 r0 top
D5 "LED_0603_RED" LED_0603_RED 56.95,5.2 r0 top
D6 "VLMG1300-GS08" FP-6_541-5092_01-4-MFG 42,10.25 r180 top
D7 "VLMG1300-GS08" FP-6_541-5092_01-4-MFG 42,7.75 r180 top
D8 "VLMG1300-GS08" FP-6_541-5092_01-4-MFG 42,2.75 r180 top
D9 "LED_0603_RED" LED_0603_RED 56.95,10.2 r0 top
"DBG DRN" "TP_2MM" "TESTPOINT 2MM" 57.75,12.25 r90 top
"DGB LED" "TP_2MM" "TESTPOINT 2MM" 52.75,12.25 r90 top
FB1 "120R" FB_0603 12.75,28.05 r270 top
GND "TP_2MM" "TESTPOINT 2MM" 65.7,2.8 r0 top
GND "TP_2MM" "TESTPOINT 2MM" 57.5,14.75 r0 top
GND "TP_2MM" "TESTPOINT 2MM" 85,12.5 r0 top
GND "TP_2MM" "TESTPOINT 2MM" 42.25,65.75 r0 top
GND "TP_2MM" "TESTPOINT 2MM" 2.25,11.5 r90 top
IC1 "STM32U5G9ZJT6Q" QFP50P2200X2200X160-144N 45,32.5 r315 top locked
IC2 "TCR2EF33,LM_CT" SOT-25 3.55,39.75 r270 top
IC3 "TCR2EF28,LM_CT" TCR2EF28LMCT 14.3,36.5 r270 top
IC4 "TCR2EF18,LM_CT" TCR2EF18LMCT 13.3,32.6 r270 top
IC6 "AT25SF2561C-MWUB-T" SON127P800X600X80-9N-D 23.5,22 r0 top
J1 "USB C Connector" UJ20CHGMSMT2P16TR 6.5,21 r270 top locked
J2 "MSD-4-A" MSD4A 62.5,59.5 r180 top locked
J3 "TC2050-IDC" TC2050-IDC 74.633,52.048 r90 top locked
J4 "TSW-103-14-G-S" FP-TSW-103-14-G-S-MFG 4,52 r270 top
J5 "505110-3691" 5051103691 85,32.5 r90 top locked
L1 "2.2uH" INDC1608X90X30LL10T20 36.5,19.25 r225 top
LS1 "CBT-09427-SMT-TR" CBT09427SMTTR 28.05,8.05 r180 top
MLED1 "TP_2MM" "TESTPOINT 2MM" 36.25,8.75 r0 top
MLED2 "TP_2MM" "TESTPOINT 2MM" 45.25,14.5 r90 top
MNT1 "M3 Mount" M3_Mount-Footprint-1 85,6.5 r0 top
MNT2 "M3 Mount" M3_Mount-Footprint-1 85,62.5 r0 top
MNT3 "M3 Mount" M3_Mount-Footprint-1 5,62.5 r0 top
MNT4 "M3 Mount" M3_Mount-Footprint-1 5,6.5 r0 top
NRST "TP_2MM" "TESTPOINT 2MM" 20.5,35 r90 top
P1 "61300211121" 61300211121 87,52.5 r90 top
P2 "61301221121" 61301221121 75.77,9.31 r270 top locked
P3 "MTSW-104-07-T-S-170" SMTC-MTSW-104-07-X-S-170 16.75,11.83 r270 top
PA "TP_2MM" "TESTPOINT 2MM" 10.25,40 r0 top
PS "TP_2MM" "TESTPOINT 2MM" 13,42 r180 top
Q1 "DMG1012T" SOT50P160X90-3N 7.5,39 r180 top
Q2 "DMG1012T" SOT50P160X90-3N 53.45,7.7 r0 top
Q4 "DMG1012T" SOT50P160X90-3N 53.45,2.7 r0 top
Q6 "DMG1012T" SOT50P160X90-3N 53.45,5.2 r0 top
Q7 "DMG1012T" SOT50P160X90-3N 53.45,10.2 r0 top
R1 "Resistor 10k +/-1% 0603 100mW" RESC1608X55X25ML10T15-1 11.75,22.25 r0 top value=5.1k
R2 "Resistor 10k +/-1% 0603 100mW" RESC1608X55X25ML10T15-1 11.75,19.25 r0 top value=5.1k
R3 "CSNL2512FT2L00" RESC6432X145N 7,33.5 r90 top
R3V3 "TP_2MM" "TESTPOINT 2MM" 5.25,42 r90 top
R4 "Resistor 10k +/-1% 0603 100mW" RESC1608X55X25ML10T15-1 13,44.5 r90 top value=10k
R6 "Resistor 10k +/-1% 0603 100mW" RESC1608X55X25ML10T15-1 10.25,37.75 r270 top value=10k
R7 "RC0603JR-070RL" RESC1608X55X25ML10T15 70.5,48.5 r90 top
R8 "Resistor 10k +/-1% 0603 100mW" RESC1608X55X25ML10T15-1 38.75,5.25 r0 top value=470
R9 "Resistor 10k +/-1% 0603 100mW" RESC1608X55X25ML10T15-1 38.75,10.25 r180 top value=470
R10 "Resistor 10k +/-1% 0603 100mW" RESC1608X55X25ML10T15-1 38.75,7.75 r180 top value=470
R11 "Resistor 10k +/-1% 0603 100mW" RESC1608X55X25ML10T15-1 43,55.5 r0 top value=10k
R12 "Resistor 10k +/-1% 0603 100mW" RESC1608X55X25ML10T15-1 49.75,55.5 r180 top value=10k
R13 "Resistor 10k +/-1% 0603 100mW" RESC1608X55X25ML10T15-1 29.5,62.5 r270 top value=10k
R15 "Resistor 10k +/-1% 0603 100mW" RESC1608X55X25ML10T15-1 38.75,2.75 r180 top value=470
R16 "Resistor 10k +/-1% 0603 100mW" RESC1608X55X25ML10T15-1 19.75,38.5 r180 top value=10k
R17 "Resistor 10k +/-1% 0603 100mW" RESC1608X55X25ML10T15-1 31.25,43.75 r45 top value=10k
R18 "Resistor 10k +/-1% 0603 100mW" RESC1608X55X25ML10T15-1 24.5,28.75 r0 top value=10k
R19 "Resistor 10k +/-1% 0603 100mW" RESC1608X55X25ML10T15-1 24.5,30.75 r0 top value=10k
R20 "Resistor 10k +/-1% 0603 100mW" RESC1608X55X25ML10T15-1 17.5,20.5 r270 top value=10k
R21 "Resistor 10k +/-1% 0603 100mW" RESC1608X55X25ML10T15-1 62,48.5 r270 top value=47k
R22 "Resistor 10k +/-1% 0603 100mW" RESC1608X55X25ML10T15-1 66.5,48.5 r270 top value=47k
R23 "Resistor 10k +/-1% 0603 100mW" RESC1608X55X25ML10T15-1 68.5,48.5 r270 top value=47k
R24 "Resistor 10k +/-1% 0603 100mW" RESC1608X55X25ML10T15-1 57.5,49.5 r270 top value=47k
R25 "Resistor 10k +/-1% 0603 100mW" RESC1608X55X25ML10T15-1 60,48.5 r270 top value=47k
R26 "Resistor 10k +/-1% 0603 100mW" RESC1608X55X25ML10T15-1 50.75,18.75 r135 top value=10k
R27 "Resistor 10k +/-1% 0603 100mW" RESC1608X55X25ML10T15-1 64.5,13.5 r180 top value=10k
RESETBAR "TP_2MM" "TESTPOINT 2MM" 75.75,40.25 r90 top
RLED1 "TP_2MM" "TESTPOINT 2MM" 46,12 r0 top
RLED2 "TP_2MM" "TESTPOINT 2MM" 46.75,15.75 r0 top
RN1 "BCN164AB103J7" BCN164AB103J7 54.5,14.75 r270 top locked
RN4 "BCN164AB471J7" BCN164AB471J7 60.2,14.5 r180 top locked
S1 "CJS-1200TA2" CJS1200TA2 8.75,43.25 r0 top locked
S2 "TL3305BF100QG" TL3305BF100QG 37,59.5 r0 top
S3 "TL3305BF100QG" TL3305BF100QG 17.75,44.5 r270 top
S5 "TL3305BF100QG" TL3305BF100QG 47,59.5 r0 top
S6 "CJS-1200TA2" CJS1200TA2 65.5,6.5 r270 top
SCRLL_BTN "TP_2MM" "TESTPOINT 2MM" 29,54.25 r90 top
SCROLL_A "TP_2MM" "TESTPOINT 2MM" 36,53.25 r90 top
SCROLL_B "TP_2MM" "TESTPOINT 2MM" 37.5,52 r90 top
SD_CD "TP_2MM" "TESTPOINT 2MM" 71,56.5 r0 top
SENSOR_RST "TP_2MM" "TESTPOINT 2MM" 21.75,28.75 r90 top
SENSOR_RST_GND "TP_2MM" "TESTPOINT 2MM" 21.75,30.75 r90 top
SHUTTER "TP_2MM" "TESTPOINT 2MM" 52.25,52.25 r90 top
SLED1 "TP_2MM" "TESTPOINT 2MM" 38.5,12 r0 top
SLED2 "TP_2MM" "TESTPOINT 2MM" 42.75,12 r0 top
STANDBY "TP_2MM" "TESTPOINT 2MM" 74.75,41.5 r90 top
TIM1 "TP_2MM" "TESTPOINT 2MM" 32,13 r0 top
TRIGGER "TP_2MM" "TESTPOINT 2MM" 77,38.25 r90 top
U1 "EN11-HSM1AF20" EN11HSM1AF20 12,61.85 r270 top locked
U2 "INA181A2IDBVR" SOT95P280X145-6N 3.25,32.5 r90 top
V1 "TP_2MM" "TESTPOINT 2MM" 4.25,29 r90 top
V2 "TP_2MM" "TESTPOINT 2MM" 4,35.904 r90 top
VBUS "TP_2MM" "TESTPOINT 2MM" 12.15,25.2 r0 top
VDDCORE "TP_2MM" "TESTPOINT 2MM" 39,13.25 r90 top
VREF "TP_2MM" "TESTPOINT 2MM" 26.5,38 r0 top
WLED1 "TP_2MM" "TESTPOINT 2MM" 36.25,2.75 r90 top
WLED2 "TP_2MM" "TESTPOINT 2MM" 48.5,15.75 r90 top
Y1 "ECS-327TXO-2012-33-TR" ECS327TXO201233TR 38.75,47.25 r225 top
Y2 "ECS-TXO-2016-33-400-TR" ECS-TXO-2016-33-400-TR 33,42 r225 top locked

## Footprints (in the part's own frame and the unit in brackets; to place one, negate y for a bottom-side part, rotate by r counter-clockwise, add the part's x,y. Pads: shape width x height; smd on the part's side, far side on the other; paste and mask are expansions set on the pad)
5051103691 [mm]
  rect 0.3x1 smd mask+0.051: 1(-8.75,2.425) 2(-8.25,2.425) 3(-7.75,2.425) 4(-7.25,2.425) 5(-6.75,2.425) 6(-6.25,2.425) 7(-5.75,2.425) 8(-5.25,2.425) 9(-4.75,2.425) 10(-4.25,2.425) 11(-3.75,2.425) 12(-3.25,2.425) 13(-2.75,2.425) 14(-2.25,2.425) 15(-1.75,2.425) 16(-1.25,2.425) 17(-0.75,2.425) 18(-0.25,2.425) 19(0.25,2.425) 20(0.75,2.425) 21(1.25,2.425) 22(1.75,2.425) 23(2.25,2.425) 24(2.75,2.425) 25(3.25,2.425) 26(3.75,2.425) 27(4.25,2.425) 28(4.75,2.425) 29(5.25,2.425) 30(5.75,2.425) 31(6.25,2.425) 32(6.75,2.425) 33(7.25,2.425) 34(7.75,2.425) 35(8.25,2.425) 36(8.75,2.425)
  rect 2x1.3 smd: MP1(-11.05,-0.275) MP2(11.05,-0.275)
  silkscreen extent -11.35,-2.63 11.35,3.5, body extent -11.75,-2.65 11.75,2.65, height 1.9
61300211121 [mm] "Pin Header, pitch 2.54 mm, THT, Vertical, single row, 2p"
  rrect50% 1.6x1.6 hole 1.1: 1(-1.27,0)
  round 1.6 hole 1.1: 2(1.27,0)
  silkscreen extent -3.26,-1.35 2.69,1.35, body extent -2.54,-1.27 2.54,1.27, height 8.57
61301221121 [mm] "Pin Header, pitch 2.54 mm, THT, Vertical, dual row, 12p"
  rrect50% 1.65x1.65 hole 1.1: 1(-6.35,-1.27)
  round 1.65 hole 1.1: 2(-6.35,1.27) 3(-3.81,-1.27) 4(-3.81,1.27) 5(-1.27,-1.27) 6(-1.27,1.27) 7(1.27,-1.27) 8(1.27,1.27) 9(3.81,-1.27) 10(3.81,1.27) 11(6.35,-1.27) 12(6.35,1.27)
  silkscreen extent -8.35,-2.62 7.77,2.62, body extent -7.62,-2.54 7.62,2.54, height 8.59
BCN164AB103J7 [mm]
  rect 0.45x1 smd: 1(-1.2,-1) 2(-1.2,1) 3(-0.4,-1) 4(-0.4,1) 5(0.4,-1) 6(0.4,1) 7(1.2,-1) 8(1.2,1)
  silkscreen extent -1.6,-0.2 1.6,0.2, body extent -1.6,-0.93 1.6,0.67, height 0.51
BCN164AB471J7 [mm]
  rect 0.45x1 smd: 1(-1.2,-1) 2(-0.4,-1) 3(0.4,-1) 4(1.2,-1) 5(1.2,1) 6(0.4,1) 7(-0.4,1) 8(-1.2,1)
  silkscreen extent -1.6,-0.2 1.6,0.2, body extent -1.6,-1.46 1.6,1.46, height 0.7
C0603 [mm]
  rect 0.64x0.89 smd mask+0.05: 1(-0.7,0) 2(0.7,0)
  silkscreen extent -0.11,-0.55 0.11,0.55, body extent -0.9,-0.5 0.9,0.5, height 1.4
CAP_0603 [mm]
  rect 0.8x1 smd: 1(-0.75,0) 2(0.75,0)
  body extent -0.8,-0.4 0.8,0.4, height 0.51
CBT09427SMTTR [mm]
  rect 3.3x2.5 smd: 1(-4.05,-0.75) 2(4.05,-0.75)
  silkscreen extent -6.8,-0.9 2.6,5.25, body extent -5.14,-5.35 5.36,5.15, height 2.9
CJS1200TA2 [mm]
  rect 1x1.6 smd: 1(-1.75,-1.15) 2(0,1.15) 3(1.75,-1.15)
  silkscreen extent -2.7,-2.5 2.7,1.25, body extent -2.7,-1.4 2.7,1.4, height 2.52
ECS327TXO201233TR [mm]
  rect 0.85x0.7 smd: 1(-0.725,-0.5) 2(0.725,-0.5) 3(0.725,0.5) 4(-0.725,0.5)
  silkscreen extent -0.77,-1.4 -0.68,-1.3, body extent -1.08,-0.78 1.08,0.78, height 1.3
ECS-TXO-2016-33-400-TR [mm]
  rect 0.8x0.7 smd: 1(-0.65,-0.5) 2(0.65,-0.5) 3(0.65,0.5) 4(-0.65,0.5)
  silkscreen extent -1.8,-0.5 -1.6,-0.3, body extent -1,-0.8 1,0.8, height 0.9
EN11HSM1AF20 [mm]
  round 1.65 hole 1.1: A1(0,0) B1(5,0) C1(2.5,0) D1(0,14.5) E1(5,14.5)
  round 4.74 hole 3.16: MH1(-2.15,7.5) MH2(7.15,7.5)
  silkscreen extent -3.35,-1.4 8.35,14.75, body extent -3.63,-0.45 8.63,14.95, height 27.2
FB_0603 [mm]
  rect 0.8x1 smd: 1(-0.75,0) 2(0.75,0)
  body extent -0.8,-0.4 0.8,0.4, height 0.81
"Fid Marker"#1 [mm]
  round 1 smd mask+0.5: 3(1,0)
"Fid Marker"#2 [mm]
  round 1 smd mask+0.5: 3(0,-0.5)
"Fid Marker"#3 [mm]
  round 1 smd mask+0.5: 3(0,0)
FP-6_541-5092_01-4-MFG [mm]
  rect 0.8x0.8 smd paste+0 mask+0: 1(-0.75,0) 2(0.75,0)
  silkscreen extent -1.85,-0.8 0.9,0.8, body extent -1.25,-0.6 1.25,0.6, height 0.25
FP-CC0603-DA-MFG [mm]
  rect 0.8x0.9 smd paste+0 mask+0: 1(-0.75,0) 2(0.75,0)
  silkscreen extent -0.85,-0.85 0.85,0.85, body extent -1.35,-0.75 1.35,0.75, height 0.25
FP-TSW-103-14-G-S-MFG [mm]
  rect 1.57x1.57 hole 1.02 paste-2539.97 mask+0: 1(-2.54,0)
  round 1.57 hole 1.02 paste-2539.97 mask+0: 2(0,0) 3(2.54,0)
  silkscreen extent -4,-1.95 4,1.34, body extent -4.1,-1.44 4.1,1.44, height 0.25
INDC1608X90X30LL10T20 [mm] "Chip Inductor, 2-Leads, Body 1.7x0.9mm, IPC High Density"
  rect 0.64x0.84 smd: 1(-0.66,0) 2(0.66,0)
  body extent -0.85,-0.45 0.85,0.45, height 0.9
LED_0603_RED [mm]
  rect 0.8x1 smd: A(0.75,0) K(-0.75,0)
  body extent -0.8,-0.4 0.8,0.4, height 0.6
M3_Mount-Footprint-1 [mm]
  round 0.8 hole 0.5: 1(-2.5,0) 1(-1.8,-1.8) 1(-1.8,1.8) 1(0,-2.5) 1(0,2.5) 1(1.8,-1.8) 1(1.8,1.8) 1(2.5,0)
  round 6.4 hole 3.4: 1(0,0)
MSD4A [mm]
  rect 0.7x1.6 smd: 1(2.25,6.9) 2(1.15,6.9) 3(0.05,6.9) 4(-1.05,6.9) 5(-2.15,6.9) 6(-3.25,6.9) 7(-4.35,6.9) 8(-5.45,6.9) CD1(-6.55,6.9)
  rect 1.5x1.6 smd: G1(6.85,5.85)
  rect 1.2x2.2 smd: G2(7.75,-3.7) G3(-7.75,-3.7)
  rect 1.2x1.8 smd: G4(-7.75,5.6)
  round 0.5 hole 1 unplated: MH1(3.05,-4.1) MH2(-4.95,-4.1)
  silkscreen extent -7.4,-1.7 7.4,8.3, body extent -8.16,-7.79 7.99,7.26, height 1.9
QFP50P2200X2200X160-144N [mm]
  rect 1.475x0.3 smd mask+0.051: 1(-10.738,8.75) 2(-10.738,8.25) 3(-10.738,7.75) 4(-10.738,7.25) 5(-10.738,6.75) 6(-10.738,6.25) 7(-10.738,5.75) 8(-10.738,5.25) 9(-10.738,4.75) 10(-10.738,4.25) 11(-10.738,3.75) 12(-10.738,3.25) 13(-10.738,2.75) 14(-10.738,2.25) 15(-10.738,1.75) 16(-10.738,1.25) 17(-10.738,0.75) 18(-10.738,0.25) 19(-10.738,-0.25) 20(-10.738,-0.75) 21(-10.738,-1.25) 22(-10.738,-1.75) 23(-10.738,-2.25) 24(-10.738,-2.75) 25(-10.738,-3.25) 26(-10.738,-3.75) 27(-10.738,-4.25) 28(-10.738,-4.75) 29(-10.738,-5.25) 30(-10.738,-5.75) 31(-10.738,-6.25) 32(-10.738,-6.75) 33(-10.738,-7.25) 34(-10.738,-7.75) 35(-10.738,-8.25) 36(-10.738,-8.75) 73(10.738,-8.75) 74(10.738,-8.25) 75(10.738,-7.75) 76(10.738,-7.25) 77(10.738,-6.75) 78(10.738,-6.25) 79(10.738,-5.75) 80(10.738,-5.25) 81(10.738,-4.75) 82(10.738,-4.25) 83(10.738,-3.75) 84(10.738,-3.25) 85(10.738,-2.75) 86(10.738,-2.25) 87(10.738,-1.75) 88(10.738,-1.25) 89(10.738,-0.75) 90(10.738,-0.25) 91(10.738,0.25) 92(10.738,0.75) 93(10.738,1.25) 94(10.738,1.75) 95(10.738,2.25) 96(10.738,2.75) 97(10.738,3.25) 98(10.738,3.75) 99(10.738,4.25) 100(10.738,4.75) 101(10.738,5.25) 102(10.738,5.75) 103(10.738,6.25) 104(10.738,6.75) 105(10.738,7.25) 106(10.738,7.75) 107(10.738,8.25) 108(10.738,8.75)
  rect 0.3x1.475 smd mask+0.051: 37(-8.75,-10.738) 38(-8.25,-10.738) 39(-7.75,-10.738) 40(-7.25,-10.738) 41(-6.75,-10.738) 42(-6.25,-10.738) 43(-5.75,-10.738) 44(-5.25,-10.738) 45(-4.75,-10.738) 46(-4.25,-10.738) 47(-3.75,-10.738) 48(-3.25,-10.738) 49(-2.75,-10.738) 50(-2.25,-10.738) 51(-1.75,-10.738) 52(-1.25,-10.738) 53(-0.75,-10.738) 54(-0.25,-10.738) 55(0.25,-10.738) 56(0.75,-10.738) 57(1.25,-10.738) 58(1.75,-10.738) 59(2.25,-10.738) 60(2.75,-10.738) 61(3.25,-10.738) 62(3.75,-10.738) 63(4.25,-10.738) 64(4.75,-10.738) 65(5.25,-10.738) 66(5.75,-10.738) 67(6.25,-10.738) 68(6.75,-10.738) 69(7.25,-10.738) 70(7.75,-10.738) 71(8.25,-10.738) 72(8.75,-10.738) 109(8.75,10.738) 110(8.25,10.738) 111(7.75,10.738) 112(7.25,10.738) 113(6.75,10.738) 114(6.25,10.738) 115(5.75,10.738) 116(5.25,10.738) 117(4.75,10.738) 118(4.25,10.738) 119(3.75,10.738) 120(3.25,10.738) 121(2.75,10.738) 122(2.25,10.738) 123(1.75,10.738) 124(1.25,10.738) 125(0.75,10.738) 126(0.25,10.738) 127(-0.25,10.738) 128(-0.75,10.738) 129(-1.25,10.738) 130(-1.75,10.738) 131(-2.25,10.738) 132(-2.75,10.738) 133(-3.25,10.738) 134(-3.75,10.738) 135(-4.25,10.738) 136(-4.75,10.738) 137(-5.25,10.738) 138(-5.75,10.738) 139(-6.25,10.738) 140(-6.75,10.738) 141(-7.25,10.738) 142(-7.75,10.738) 143(-8.25,10.738) 144(-8.75,10.738)
  silkscreen extent -11.35,-9.65 9.65,9.65, body extent -10.95,-10.95 10.95,10.95, height 1.6
RESC1608X55X25ML10T15 [mm] "Chip Resistor, 2-Leads, Body 1.60x0.80mm, IPC Low Density"
  rect 0.8x1 smd: 1(-0.75,0) 2(0.75,0)
  body extent -0.85,-0.45 0.85,0.45, height 0.55
RESC1608X55X25ML10T15-1 [mm] "Chip Resistor, 2-Leads, Body 1.70x0.90mm, IPC Low Density"
  rect 0.8x1 smd: 1(-0.75,0) 2(0.75,0)
  body extent -0.85,-0.45 0.85,0.45, height 0.55
RESC6432X145N [mm]
  rect 2.1x3.45 smd: 1(-2.6,0) 2(2.6,0)
  silkscreen extent 0,-1.49 0,1.49, body extent -3.17,-1.59 3.18,1.59, height 0.35
SMTC-MTSW-104-07-X-S-170 [mm] "Assembly .025\" [.64] SQ Post Terminal Strip, 1x4 Pins, Vertical, 2.54mm Pitch, Male"
  rect 1.55x1.55 hole 1.02: 1(0,0)
  round 1.55 hole 1.02: 2(2.54,0) 3(5.08,0) 4(7.62,0)
  silkscreen extent -1.46,-1.27 9.08,1.27, body extent -1.27,-1.27 8.89,1.27, height 6.86
SON127P800X600X80-9N-D [mm]
  rect 0.95x0.45 smd: 1(-3.9,1.905) 2(-3.9,0.635) 3(-3.9,-0.635) 4(-3.9,-1.905) 5(3.9,-1.905) 6(3.9,-0.635) 7(3.9,0.635) 8(3.9,1.905)
  rect 3.5x4.4 smd: 9(0,0)
  silkscreen extent -4.5,2.51 -4.25,2.75, body extent -4.05,-3 4.05,3, height 0.8
SOT50P160X90-3N [mm]
  rect 1x0.4 smd: 1(-0.75,0.5) 2(-0.75,-0.5) 3(0.75,0)
  body extent -0.8,-0.8 0.8,0.8, height 0.9
SOT95P280X145-6N [mm]
  rect 1.2x0.6 smd: 1(-1.25,0.95) 2(-1.25,0) 3(-1.25,-0.95) 4(1.25,-0.95) 5(1.25,0) 6(1.25,0.95)
  silkscreen extent -0.3,-1.45 0.3,1.45, body extent -1.4,-1.45 1.4,1.45, height 1.2
SOT-25 [mm]
  rect 0.8x1 smd: 1(-0.95,-1.2) 3(0.95,-1.2) 4(0.95,1.2) 5(-0.95,1.2)
  rect 0.6x1 smd: 2(0,-1.2)
  silkscreen extent -1.45,-2.07 1.45,0.8, body extent -1.45,-1.44 1.45,1.36, height 1.4
TC2050-IDC [mil]
  round 34 smd: 1(-62.5,-125) 2(-12.5,-125) 3(37.5,-125) 4(87.5,-125) 5(137.5,-125) 6(137.5,-75) 7(87.5,-75) 8(37.5,-75) 9(-12.5,-75) 10(-62.5,-75)
  round 42 hole 42 unplated: 11(-112.5,-100) 12(187.5,-60.04) 13(187.5,-139.96)
  round 96.5 hole 96.5 unplated: 14(112.5,-200) 15(-112.5,-200) 16(-112.5,0) 17(112.5,0)
  silkscreen extent -205,-273 280,47, body extent -305,-260 380,42, height 8191
TCR2EF18LMCT [mm]
  rect 0.8x1 smd: 1(-0.95,-1.2) 3(0.95,-1.2) 4(0.95,1.2) 5(-0.95,1.2)
  rect 0.6x1 smd: 2(0,-1.2)
  silkscreen extent -1.45,-0.35 1.45,0.8, body extent -1.45,-0.8 1.45,0.8, height 1.5
TCR2EF28LMCT [mm]
  rect 0.8x1 smd: 1(-0.95,-1.2) 3(0.95,-1.2) 4(0.95,1.2) 5(-0.95,1.2)
  rect 0.6x1 smd: 2(0,-1.2)
  silkscreen extent -1.45,-2.25 1.45,0.35, body extent -1.45,-0.8 1.45,0.8, height 1.5
"TESTPOINT 2MM" [mm]
  oct 1x1 hole 0.3: TP(0,0)
  SIG 1 region: -0.25,-0.5 -0.5,-0.25 -0.5,0.25 -0.25,0.5 0.25,0.5 0.5,0.25 0.5,-0.25 0.25,-0.5
  GND 1 region: -0.25,-0.5 -0.5,-0.25 -0.5,0.25 -0.25,0.5 0.25,0.5 0.5,0.25 0.5,-0.25 0.25,-0.5
  SIG 2 region: -0.25,-0.5 -0.5,-0.25 -0.5,0.25 -0.25,0.5 0.25,0.5 0.5,0.25 0.5,-0.25 0.25,-0.5
  PWR region: -0.25,-0.5 -0.5,-0.25 -0.5,0.25 -0.25,0.5 0.25,0.5 0.5,0.25 0.5,-0.25 0.25,-0.5
  GND 2 region: -0.25,-0.5 -0.5,-0.25 -0.5,0.25 -0.25,0.5 0.25,0.5 0.5,0.25 0.5,-0.25 0.25,-0.5
  SIG 3 region: -0.25,-0.5 -0.5,-0.25 -0.5,0.25 -0.25,0.5 0.25,0.5 0.5,0.25 0.5,-0.25 0.25,-0.5
TL3305BF100QG [mm]
  rect 1.6x1.4 smd: 1(-3.6,-1.5) 2(3.6,-1.5) 3(-3.6,1.5) 4(3.6,1.5)
  silkscreen extent -5,-2.25 2.25,2.25, body extent -3.75,-2.25 3.75,2.25, height 4.9
TPD1E10B06DPYR [mm]
  rect 0.6x0.5 smd: 1(-0.5,0) 2(0.5,0)
  silkscreen extent -2.2,-0.05 -2.1,0.05, body extent -0.5,-0.3 0.5,0.3, height 0.38
UJ20CHGMSMT2P16TR [mm]
  rect 0.6x1.1 smd: A1(-3.2,2.35) A4(-2.4,2.35) B1(3.2,2.35) B4(2.4,2.35)
  rect 0.3x1.1 smd: A5(-1.25,2.35) A6(-0.25,2.35) A7(0.25,2.35) A8(1.25,2.35) B5(1.75,2.35) B6(0.75,2.35) B7(-0.75,2.35) B8(-1.75,2.35)
  round 1.875 hole 1.25: MH1(-5.62,1.2) MH2(5.62,1.2)
  round 2.43 hole 1.62: MH3(-5.62,-2.8) MH4(5.62,-2.8)
  silkscreen extent -3.25,3.4 -3.15,3.5, body extent -5.77,-4.91 5.77,2.29, height 2.2

## Part data
C1 C2 C6 C7 C8 C9 C10 C11 C12 C13 C14 C15 C16 C17 C18 C19 C20 C21 C22 C23 C24 C25 C26 C27 C28 C29 C30 C31 C32 C33 C34 C35 C36 C37 C38 C39 C40 C41: library part CMP-112-000001-1, "Capacitor, MLCC, 100nF, 6V3, X5R, 10%, 0603, T=0,8mm", Manufacturer=YAGEO, Manufacturer Part Number=CC0603KRX5R5BB104, Package=C0603, Component Type=Capacitors, ComponentLink1Description=Datasheet, ComponentLink1URL=http://tunmcdsvn.tun.st.com/Component_Datasheet_Library/Trunk/Capacitors/Yageo_Multilayer_capacitor_X5R_series_100pF_to_100uF, Design Item ID=MCD-00237, ECCN_EU=NEC, ECCN_US=EAR99, Internal_Part_Number=MCD-00237, Manufacturer_Part_Number=CC0603KRX5R5BB104, Part_Type=Capacitor, Pin Count=2, Provided_By=SUBCO, Source=MB1364.SCHLIB, Status=Released
C3 C4: library part CMP-004-000035-1, "Capacitor SMD 0603 16V", Design Item ID=CAP_0603_16V, Source=Schematic-Lib-PhilsLab.SchLib
C5: library part CMP-2100-03600-2, "CAP CER 10000PF 50V X7R 0603", Capacitance="10 nF", Manufacturer=YAGEO, Package=CC0603-DA, Temperature="-55°C to +125°C", Temperature Characteristic=X7R, Temperature Coefficient=15%, Temperature Range High=+125°C, Temperature Range Low=-55°C, Tolerance=0.1, Voltage="50 V", Automotive=No, Category=Cap, ComponentLink2Description=Datasheet, ComponentLink2URL=http://www.yageo.com/documents/recent/UPY-GPHC_X7R_6.3V-to-50V_18.pdf, Device Class L1="Passive Components", Device Class L2=Capacitors, Device Class L3="Ceramic Capacitors", Digikey Description="CAP CER 10000PF 50V X7R 0603", Footprint Url=http://www.yageo.com/exep/pages/download/literatures/UPY-C_GEN_24.pdf, Height=0.9mm, Lead Free=Yes, Manufacturer Part Number=CC0603KRX7R9BB103, Material=Ceramic, Mouser Description="Multilayer Ceramic Capacitor, CC Series, 0.01 - F, - 10%, X7R, 50 V, 0603 [1608 Metric]", Octopart=https://octopart.com/cc0603krx7r9bb103-yageo-192938, RoHS=TRUE, Voltage Rating="50 V"
D1: "TVS Diode (Bi-directional)", Manufacturer_Name="Texas Instruments", Mouser Part Number=595-TPD1E10B06DPYR, Arrow Part Number=TPD1E10B06DPYR, Arrow Price/Stock=https://www.arrow.com/en/products/tpd1e10b06dpyr/texas-instruments?region=nac, Datasheet Link=https://www.ti.com/lit/ds/symlink/tpd1e10b06.pdf?HQS=TI-null-null-mousermode-df-pf-null-wwe&ts=1599077798252&ref_url=https%253A%252F%252Fwww.mouser.com%252F, Height=0.45mm, Manufacturer_Part_Number=TPD1E10B06DPYR, Mouser Price/Stock=https://www.mouser.co.uk/ProductDetail/Texas-Instruments/TPD1E10B06DPYR?qs=UFc95S4Z4CaJYpQ4xqTc0g%3D%3D
D2 D6 D7 D8: library part CMP-02520-000011-1, "LED GREEN 0603 SMD", Ambient Temperature Range High=+85°C, Ambient Temperature Range Low=-35°C, Colour="Yellow Green", Forward Current=20mA, Forward Voltage=2V, Manufacturer=Vishay, Package=6.541-5092.01-4, Power Dissipation=75mW, Reverse Voltage=5V, Temperature="-35°C to +85°C", Automotive=No, Category=Diode, ComponentLink2Description=Datasheet, ComponentLink2URL=http://www.vishay.com/docs/82437/vlmo1300.pdf, Device Class L1=Optoelectronics, Device Class L2=LEDs, Device Class L3=unset, Digikey Description="LED GREEN 0603 SMD", Height=1mm, Lead Free=Yes, Led Orientation="Top View", Luminous Intensity=35mcd, Manufacturer Part Number=VLMG1300-GS08, Mouser Description="LED; SMD; 0603; yellow green; 18-35mcd; 1.6x0.8x0.8mm; 130°; 2÷2.4V", Octopart=https://octopart.com/vlmg1300-gs08-vishay-21709199, Peak Emmision Wavelength=574nm, RoHS=TRUE, Temperature Range High=+85°C, Temperature Range Low=-35°C, Viewing Angle=130°, Wavelength=571nm
D3 D4 D5 D9: library part CMP-007-000026-1, "LED 0603 RED SMD", Design Item ID=LED_0603_RED, Source=Schematic-Lib-PhilsLab.SchLib
FB1: library part CMP-010-000008-1, "Ferrite Bead SMD 0603", Design Item ID=FB_0603, Source=Schematic-Lib-PhilsLab.SchLib
IC1: "Integrated Circuit", Manufacturer_Name=STMicroelectronics, Mouser Part Number=511-STM32U5G9ZJT6Q, Arrow Part Number=STM32U5G9ZJT6Q, Arrow Price/Stock=https://www.arrow.com/en/products/stm32u5g9zjt6q/stmicroelectronics?utm_currency=USD&region=nac, Datasheet Link=https://www.st.com/resource/en/datasheet/stm32u5g7vj.pdf, Height=1.6mm, Manufacturer_Part_Number=STM32U5G9ZJT6Q, Mouser Price/Stock=https://www.mouser.co.uk/ProductDetail/STMicroelectronics/STM32U5G9ZJT6Q?qs=pBunHO6%252BwtHTKyjOWi%252Btmg%3D%3D
IC2: "Integrated Circuit", Arrow Part Number=TCR2EF33,LM(CT, Manufacturer_Name=Toshiba, Mouser Part Number=757-TCR2EF33LMCT, Arrow Price/Stock=https://www.arrow.com/en/products/tcr2ef33lm-ct/toshiba?region=nac, Datasheet Link=https://toshiba.semicon-storage.com/eu/product/linear/power-supply/detail.TCR2EF33.html, Manufacturer_Part_Number=TCR2EF33,LM(CT, Mouser Price/Stock=https://www.mouser.co.uk/ProductDetail/Toshiba/TCR2EF33LMCT?qs=EPmvyOv1YlPmhsvS3PaWfg%3D%3D
IC3: "Integrated Circuit", Arrow Part Number=TCR2EF28,LM(CT, Manufacturer_Name=Toshiba, Mouser Part Number=757-TCR2EF28LMCT, Arrow Price/Stock=https://www.arrow.com/en/products/tcr2ef28lm-ct/toshiba?utm_currency=USD&region=nac, Datasheet Link=https://toshiba.semicon-storage.com/info/docget.jsp?did=13794&prodName=TCR2EF28, Height=1.4mm, Manufacturer_Part_Number=TCR2EF28,LM(CT, Mouser Price/Stock=https://www.mouser.co.uk/ProductDetail/Toshiba/TCR2EF28LMCT?qs=cW4DzVrAanOy43sfBSrpyQ%3D%3D
IC4: "Integrated Circuit", Arrow Part Number=TCR2EF18,LM(CT, Manufacturer_Name=Toshiba, Mouser Part Number=757-TCR2EF18LMCT, Arrow Price/Stock=http://www.arrow.com/en/products/tcr2ef18lm-ct/toshiba, Datasheet Link=https://toshiba.semicon-storage.com/info/TCR2EF18_datasheet_ja_20200507.pdf?did=13793&prodName=TCR2EF18, Height=1.4mm, Manufacturer_Part_Number=TCR2EF18,LM(CT, Mouser Price/Stock=https://www.mouser.co.uk/ProductDetail/Toshiba/TCR2EF18LMCT?qs=EPmvyOv1YlMU%252B9uLgN8FiA%3D%3D
IC6: "Integrated Circuit", Manufacturer_Name="Renesas Electronics", Datasheet Link=https://www.renesas.com/us/en/products/memory-logic/non-volatile-memory/spi-nor-flash/at25sf2561c-256mbit-3v-spi-serial-flash-memory-single-dual-quad-io-qpi-and-dtr-support, Height=0.8mm, Manufacturer_Part_Number=AT25SF2561C-MWUB-T
J1: library part CMP-026-000123-2, "UJ20-C-H-G-MSMT-2-P16-TR Connector", Manufacturer_Name="Same Sky", Manufacturer_Part_Number=UJ20-C-H-G-MSMT-2-P16-TR, Mouser Part Number=179-UJ20CHGMSMT2P16T, Author="Raphael Ho", Datasheet Link=https://cz.mouser.com/ProductDetail/Same-Sky/UJ20-C-H-G-MSMT-2-P16-TR?qs=IKkN%2F947nfBldcIwp9d6BA%3D%3D, Design Item ID=UJ20-C-H-G-MSMT-2-P16-TR, Height=3.36mm, Mouser Price/Stock=https://www.mouser.co.uk/ProductDetail/Same-Sky/UJ20-C-H-G-MSMT-2-P16-TR?qs=IKkN%2F947nfBldcIwp9d6BA%3D%3D, Source=SamacSys.SchLib
J2: "Connector", Manufacturer_Name="Same Sky", Mouser Part Number=179-MSD-4-A, Arrow Part Number=MSD-4-A, Arrow Price/Stock=https://www.arrow.com/en/products/msd-4-a/cui-devices?utm_currency=USD&region=nac, Datasheet Link=https://www.sameskydevices.com/product/resource/msd-4-a.pdf, Height=2mm, Manufacturer_Part_Number=MSD-4-A, Mouser Price/Stock=https://www.mouser.co.uk/ProductDetail/Same-Sky/MSD-4-A?qs=Z%252BL2brAPG1Jll%252BQTi%252Btupg%3D%3D
J3: "Connector", Manufacturer_Name="Tag Connect", Datasheet Link=https://datasheet.datasheetarchive.com/originals/distributors/Datasheets_SAMA/51f607a36a24a0aceedaa5d6ebc30014.pdf, Manufacturer_Part_Number=TC2050-IDC
J4: library part CMP-02766-001743-1, "CONN HEADER VERT 3POS 2.54MM", Color=Black, Flammability Rating="UL94 V-0", Max Current Rating=7.6A, Max Operating Temperature=125°C, Max Voltage Rating (AC)=550V, Min Operating Temperature=-55°C, Package Quantity=1, Connector Type=Header, Contact Finish - Mating=GOLD, Contact Material=Bronze, Contact Mating Length=0.32inch, Contact Plating=Gold, Contact Shape=Square, Contact Type="Male Pin", Depth=2.54mm, Fastening Type=Pull, Gender=Male, Height=10.67mm, Housing Color=Black, Housing Material=Polyester, Insulation Color=Black, Insulation Material=PBT, Lead Free="Lead Free", Length=7.62mm, Mount="Through Hole", Number of Contacts=3, Number of Positions=3, Number of Rows=1, Orientation=Straight, Packaging=Bulk, Pitch=2.54mm, Radiation Hardening=No, REACH SVHC="No SVHC", RoHS Compliant=Yes, Series=TSW, Termination=Solder, Width=2.54mm
J5: "Connector", Manufacturer_Name=Molex, Mouser Part Number=N/A, Datasheet Link=https://www.molex.com/content/dam/molex/molex-dot-com/products/automated/en-us/salesdrawingpdf/505/505110/5051103691_sd.pdf, Height=2.1mm, Manufacturer_Part_Number=505110-3691, Mouser Price/Stock=https://www.mouser.com/Search/Refine.aspx?Keyword=N%2FA
L1: library part CMP-2000-05913-1, "Unshielded Wirewound Inductor, 33 nH, 350 mA, -55 to 150 degC, 0603 (1608 Metric), RoHS, Tape and Reel", Current - Saturation=-, Current Rating=350mA, DC Resistance (DCR)=600mOhmMax, Frequency - Self Resonant=3GHz, Frequency - Test=100MHz, Inductance=33nH, Manufacturer=EPCOS-(TDK), Package / Case=0603(1608Metric), Package Description="2-Pin Surface Mount Device, Body 1.6 x 0.8 mm", Package Reference=0603, Q @ Freq=14@100MHz, Ratings=AEC-Q200, Tolerance=±5%, Category=Inductors,Coils,Chokes, Datasheet URL=https://en.tdk.eu/inf/30/db/ind_2008/b82496c.pdf, Datasheet Version=07/2016, Family=FixedInductors, Height - Seated (Max)="0.035\"(0.90mm)", Manufacturer URL=http://www.tdk.com/, Material - Core=Ceramic, Mounting Technology=SurfaceMount, Mounting Type=SurfaceMount, Operating Temperature=-, Packaging=CutTape(CT), Series=SIMID, Shielding=Unshielded, Size / Dimension="0.063\"Lx0.031\"W(1.60mmx0.80mm)", Type=Wirewound
LS1: "Loudspeaker or Buzzer", Manufacturer_Name="Same Sky", Mouser Part Number=490-CBT-09427-SMT-TR, Arrow Part Number=CBT-09427-SMT-TR, Arrow Price/Stock=https://www.arrow.com/en/products/cbt-09427-smt-tr/cui-devices?region=nac, Datasheet Link=https://www.sameskydevices.com/product/resource/cbt-09427-smt-tr.pdf, Height=2.7mm, Manufacturer_Part_Number=CBT-09427-SMT-TR, Mouser Price/Stock=https://www.mouser.co.uk/ProductDetail/Same-Sky/CBT-09427-SMT-TR?qs=3yDvfGtJnUwSpp62uPMpGQ%3D%3D
MNT1 MNT2 MNT3 MNT4: library part CMP-002-00124-2, "M3 mounting hole", Author="Raphael Ho"
P1: library part CMP-096-000133-1, "WR-PHD Pin Header, THT, Vertical, pitch 2.54mm, 1 Row, 2P", Contact Resistance=20mOhm, Manufacturer="Wurth Elektronik", Operating Temperature Max=105°C, Operating Temperature Min=-40°C, Rated Current=3A, Withstanding Voltage=500V, Working Voltage=250V, Category="Board-to-Board Connectors", Component Type=Standard, ComponentLink1Description="Website Link", ComponentLink1URL=https://www.we-online.com/redexpert/article/61300211121?ad, ComponentLink2Description="Datasheet Link", ComponentLink2URL=https://www.we-online.com/redexpert/spec/61300211121?ad, Design Item ID=61300211121, Gender="Pin Header", Manufacturer Part Number=61300211121, Match Code=WR-PHD, Mount="Through Hole", Number of Pins=2, Number of Rows=1, Orientation=Vertical, Packaging=Bag, Pin Count=2, Pitch=2.54mm, Source=WR-PHD.SchLib
P2: library part CMP-096-000204-1, "WR-PHD Pin Header, THT, Vertical, pitch 2.54mm, 2 Row, 12P", Contact Resistance=20mOhm, Manufacturer="Wurth Elektronik", Operating Temperature Max=105°C, Operating Temperature Min=-40°C, Rated Current=3A, Withstanding Voltage=500V, Working Voltage=250V, Category="Board-to-Board Connectors", Component Type=Standard, ComponentLink1Description="Website Link", ComponentLink1URL=https://www.we-online.com/redexpert/article/61301221121?ad, ComponentLink2Description="Datasheet Link", ComponentLink2URL=https://www.we-online.com/redexpert/spec/61301221121?ad, Design Item ID=61301221121, Gender="Pin Header", Manufacturer Part Number=61301221121, Match Code=WR-PHD, Mount="Through Hole", Number of Pins=12, Number of Rows=2, Orientation=Vertical, Packaging=Bag, Pin Count=12, Pitch=2.54mm, Source=WR-PHD.SchLib
P3: library part CMP-1024-00105-1, "Modified .025\" SQ Post Header, Through-hole, Vertical, -55 to 105 degC, 2.54 mm Pitch, 4-Pin, Male, RoHS", Manufacturer=Samtec, Temperature Range="-55 to 105 degC", ComponentLink1Description="Manufacturer URL", ComponentLink1URL=http://www.samtec.com, ComponentLink2Description=Datasheet, ComponentLink2URL=http://www.samtec.com/documents/webfiles/pdf/MTSW.PDF, ComponentLink3Description="Package Specification", ComponentLink3URL=http://www.samtec.com/documents/webfiles/cpdf/MTSW-XXX-XX-X-X-XXXX-XX-XXX-MKT1.pdf, DatasheetVersion=F-214, Mounting Technology=Through-hole, Orientation=Vertical, PackageDescription="Assembly .025\" [.64] SQ Post Terminal Strip", PackageReference=MTSW-104-07-X-S-170, PackageVersion="BI, 2/1987", PartNumber=MTSW-104-07-T-S-170, Pitch="2.54 mm", RoHS=True
Q1 Q2 Q4 Q6 Q7: "MOSFET (N-Channel)", Manufacturer_Name="Diodes Incorporated", Mouser Part Number=N/A, Datasheet Link=https://www.diodes.com/datasheet/download/DMG1012T.pdf, Height=0.9mm, Manufacturer_Part_Number=DMG1012T, Mouser Price/Stock=https://www.mouser.co.uk/ProductDetail/Diodes-Incorporated/DMG1012T?qs=Wj%2FVkw3K%252BMD5naxckZUW%2FA%3D%3D
R1 R2 R4 R6 R8 R9 R10 R11 R12 R13 R15 R16 R17 R18 R19 R20 R21 R22 R23 R24 R25 R26 R27: library part CMP-009-00181-1, "Chip Resistor, 10k Ohm, 0.1 W, -55 to 155 degC, 0603 (1608 Metric)", Case/Package=0603, Max Operating Temperature=155°C, Min Operating Temperature=-55°C, Power=100mW, Tolerance=1%, Voltage Rating=50V, Created by="Micah Randall", Design Item ID=CMP-009-00006-5, Mounting Technology=SM, Pins=2, RoHS Compliant=Yes, Source="Components - 14.11.22 - 11.28.SchLib"
R3: "Resistor", Manufacturer_Name="Stackpole Electronics", Arrow Part Number=CSNL2512FT2L00, Arrow Price/Stock=https://www.arrow.com/en/products/csnl2512ft2l00/stackpole-electronics?region=nac, Datasheet Link=https://cs.seielect.com/catalog/SEI-CSNL.pdf, Height=1.45mm, Manufacturer_Part_Number=CSNL2512FT2L00
R7: library part CMP-2100-03667-1, "Chip Resistor, 0 Ohm, +/- 5%, 0.1 W, -55 to 155 degC, 0603 (1608 Metric), RoHS, Tape and Reel", Case Code (Imperial)=0603, Case Code (Metric)=1608, Manufacturer=Yageo, Max Operating Temperature=155degC, Min Operating Temperature=-55degC, Package Description="2-Pin Surface Mount Device, Body 1.6 x 0.8 mm", Package Quantity=5000, Power Rating=100mW, Resistance=0mOhm, Temperature Coefficient=200ppm/degreesC, Tolerance=5%, Voltage Rating=50V, Case/Package=0603, Composition=ThickFilm, Contact Plating=Tin, Datasheet URL=http://www.yageo.com/NewPortal/yageodocoutput?fileName=/pdf/R-Chip/PYu-RC_Group_51_RoHS_L_5.pdf, Datasheet Version="Rev. 5, 10/2016", Depth=0.8mm, Height=0.45mm, Lead Free=LeadFree, Length=1.6mm, Manufacturer URL=http://www.yageo.com/, Military Standard=Not, Number of Pins=2, Package Reference=0603, Packaging=TapeandReel, Radiation Hardening=No, REACH SVHC=NoSVHC, RoHSCompliant=true, Termination=SMD/SMT, Voltage Rating (DC)=50V, Width=0.8mm
RN1: "Resistor Network", Manufacturer_Name="IRC / TT Electronics", Mouser Part Number=858-BCN164AB103J7, Arrow Part Number=BCN164AB103J7, Arrow Price/Stock=https://www.arrow.com/en/products/bcn164ab103j7/irc, Datasheet Link=https://componentsearchengine.com/Datasheets/1/BCN164AB103J7.pdf, Height=0.6mm, Manufacturer_Part_Number=BCN164AB103J7, Mouser Price/Stock=https://www.mouser.co.uk/ProductDetail/IRC-TT-Electronics/BCN164AB103J7?qs=sKpblPcrDFAYmBHclHBIlw%3D%3D
RN4: "Resistor Network", Manufacturer_Name="TT Electronics", Mouser Part Number=858-BCN164AB471J7, Datasheet Link=https://www.mouser.com/datasheet/2/414/BCN-1154942.pdf, Height=0.6mm, Manufacturer_Part_Number=BCN164AB471J7
S1 S6: "Switch", Manufacturer_Name="Nidec Copal", Mouser Part Number=229-CJS-1200TA2, Datasheet Link=http://www.nidec-copal-electronics.com/j/catalog/switch/cjs.pdf, Height=2.5mm, Manufacturer_Part_Number=CJS-1200TA2, Mouser Price/Stock=https://www.mouser.co.uk/ProductDetail/Nidec-Components/CJS-1200TA2?qs=XeJtXLiO41Rf26ws0igWdA%3D%3D
S2 S3 S5: "Switch", Manufacturer_Name=E-Switch, Mouser Part Number=612-TL3305BF100QG, Datasheet Link=https://configured-product-images.s3.amazonaws.com/2D/specs/TL3305BF100QG.pdf, Manufacturer_Part_Number=TL3305BF100QG, Mouser Price/Stock=https://www.mouser.co.uk/ProductDetail/E-Switch/TL3305BF100QG?qs=IKkN%2F947nfDIPwqPQja%252BvQ%3D%3D
U1: "Undefined or Miscellaneous", Manufacturer_Name="TT Electronics", Mouser Part Number=858-EN11-HSM1AF20, Datasheet Link=https://datasheet.datasheetarchive.com/originals/distributors/Datasheets_SAMA/2e239bccdca13b9604c0057335e160d7.pdf, Height=27.1mm, Manufacturer_Part_Number=EN11-HSM1AF20, Mouser Price/Stock=https://www.mouser.co.uk/ProductDetail/BI-Technologies-TT-Electronics/EN11-HSM1AF20?qs=%252BUYXD5bnyXqPYOUPwiF4VA%3D%3D
U2: "Undefined or Miscellaneous", Manufacturer_Name="Texas Instruments", Mouser Part Number=595-INA181A2IDBVR, Arrow Part Number=INA181A2IDBVR, Arrow Price/Stock=https://www.arrow.com/en/products/ina181a2idbvr/texas-instruments?utm_currency=USD&region=nac, Datasheet Link=http://www.ti.com/general/docs/suppproductinfo.tsp?distId=26&gotoUrl=http%3A%2F%2Fwww.ti.com%2Flit%2Fgpn%2Fina181, Height=1.45mm, Manufacturer_Part_Number=INA181A2IDBVR, Mouser Price/Stock=https://www.mouser.co.uk/ProductDetail/Texas-Instruments/INA181A2IDBVR?qs=5aG0NVq1C4wvxWxbAGEmKw%3D%3D
Y1: "Crystal or Oscillator", Manufacturer_Name=ECS, Mouser Part Number=520-327TXO-2012-33TR, Arrow Part Number=ECS-327TXO-2012-33-TR, Arrow Price/Stock=https://www.arrow.com/en/products/ecs-327txo-2012-33-tr/ecs-international?utm_currency=USD&region=nac, Datasheet Link=https://ecsxtal.com/store/pdf/ECS-327TXO-2012.pdf, Height=1.2mm, Manufacturer_Part_Number=ECS-327TXO-2012-33-TR, Mouser Price/Stock=https://www.mouser.co.uk/ProductDetail/ECS/ECS-327TXO-2012-33-TR?qs=amGC7iS6iy%252Bnhf6zW2Y7hQ%3D%3D
Y2: "Crystal or Oscillator", Manufacturer_Name=ECS, Mouser Part Number=520-TXO-2016-33-400T, Arrow Part Number=ECS-TXO-2016-33-400-TR, Arrow Price/Stock=https://www.arrow.com/en/products/ecs-txo-2016-33-400-tr/ecs-international?region=nac, Datasheet Link=https://datasheet.datasheetarchive.com/originals/distributors/Datasheets_SAMA/fdc451124f6f80954f29114af1256858.pdf, Height=0.8mm, Manufacturer_Part_Number=ECS-TXO-2016-33-400-TR, Mouser Price/Stock=https://www.mouser.co.uk/ProductDetail/ECS/ECS-TXO-2016-33-400-TR?qs=PzGy0jfpSMtctR53CPxRHg%3D%3D

## Free pads (board coordinates)
  round 3 hole 2: MH(15,17.5) MH(15,56.5) MH(85,17.5) MH(85,56.5)

## Via types
v1: diameter 0.6, hole 0.3, SIG 1 to SIG 3, tented both sides, 317 vias
v2: diameter 0.8, hole 0.4, SIG 1 to SIG 3, tented both sides, 9 vias
v3: diameter 1, hole 0.4, SIG 1 to SIG 3, tented both sides, 5 vias
v4: diameter 1, hole 0.5, SIG 1 to SIG 3, tented both sides, 3 vias
v5: diameter 1, hole 0.6, SIG 1 to SIG 3, tented both sides, 3 vias
v6: diameter 0.7, hole 0.3, SIG 1 to SIG 3, tented both sides, 2 vias

## Nets (pads, with @x,y where several pads share a name; then routed paths per layer and width w, separated by ;. In a path a pad name is that pad's centre, name@x,y a point inside that pad or via, vN(x,y) a via of type N, cw(c..) or ccw(c..) an arc to the next point about the centre after c; other vN are vias at no path point)
1V8: 1V8.TP C7.1 C10.1 C11.1 C12.1 C13.1 IC1.34 IC1.35 IC4.5 J4.2 J5.35 J5.36 Q4.1 RN1.1 VREF.TP | length 165.8
  SIG 1 w0.381: Q4.1@52.7,3.2 51.45,3.2 49.5,5.15 v1(49.5,7.5) 49.5,14.5 50.95,15.95 RN1.1@53.5,15.95
  SIG 1 w0.6: 82.5,41 85.5,41 v1(86,40.5)
  SIG 3 w0.6: J4.2@4,52 4.262,52 4.762,51.5 11.5,51.5 15.5,47.5 15.5,33.75 v1(15.75,33.5) 15.5,33.5 15.25,33.5 v1(14.5,32.75) 14.5,30 18.5,26 18.5,15.5 26.5,7.5 v1(49.5,7.5) 52.25,10.25 57.75,10.25 59.5,12 59.5,15.5 63,19 81,19 86,24 v1(86,40.5)
  other v1: 15.75,32.75 29,34 29.75,34.75 30.5,35.5 28.412,36.145
1V8_DRAIN: "1V8 DRN.TP" D4.A RN4.8 | length 13.1
  SIG 1 w0.381: D4.A@57.7,2.7 58.95,2.7 61.4,5.15 RN4.8@61.4,13.5
2V8: 2V8.TP C6.1 IC3.5 J4.3 J5.32 J5.33 Q6.1 RN1.3 | length 175.5
  SIG 1 w0.381: Q6.1@52.7,5.7 51.3,5.7 50.5,6.5 50.5,14 51.65,15.15 RN1.3@53.5,15.15
  SIG 1 w0.6: 82.5,39.5 85.75,39.5 v1(87.75,37.5)
  PWR w1: 15.75,38.368 15.75,41.75 18.75,44.75 2V8.TP@23.394,44.75
  SIG 3 w0.6: J4.3@4,49.46 4.046,49.46 4.836,50.25 10.75,50.25 14.25,46.75 v1(14.25,38.5) v1(14.25,37.5) 14.25,34.75 13,33.5 13,29 17,25 17,14.5 25.75,5.75 v1(51.25,5.75) 53.75,8.25 57.5,8.25 61.5,12.25 61.5,15 64,17.5 81.5,17.5 87.75,23.75 v1(87.75,37.5)
  other v1: 16.5,37.5 16.5,38.5 17.5,38.5
2V8_DRAIN: "2V8 DRN.TP" D5.A RN4.7 | length 10.5
  SIG 1 w0.381: D5.A@57.7,5.2 58.75,5.2 59.45,5.2 60.6,6.35 RN4.7@60.6,13.5
3V3: 3V3.TP C5.1 C8.2 C9.2 C14.1 C15.1 C16.1 C17.1 C18.1 C19.1 C20.1 C23.2 C24.1 C28.1 C29.1 C30.1 C31.1 C32.1 C33.1 C34.1 C35.1 C36.1 C37.1 C38.1 C39.1 IC1.6 IC1.13 IC1.25 IC1.41 IC1.55 IC1.65 IC1.69 IC1.83 IC1.89 IC1.95 IC1.108 IC1.109 IC1.122 IC1.131 IC1.144 IC3.1 IC3.3 IC4.1 IC4.3 IC6.8 J2.4 J3.1 J4.1 P3.3 Q1.2 Q2.1 R7.1 R13.1 R17.1 R20.2 R21.2 R22.2 R23.2 R24.2 R25.2 RN1.5 S1.2 S2.1 S2.3 S5.1 S5.3 S6.1 SENSOR_RST_GND.TP U2.6 Y1.1 Y1.4 Y2.4 | length 104.2
  SIG 1 w0.152: v1(12,38.75) 12.9,38.75 C9.2@13,38.85 ; v1(16,19.75) R20.2@17.5,19.75 ; v1(27.5,24.75) 27.5,24.005 IC6.8@27.4,23.905 C38.1@29.1,23.905 ; IC1.6@41.827,44.512 42.5,43.839 v1(42.5,42.75) ; v1(57.5,47.75) R24.2@57.5,48.75 ; v1(60,46.75) R25.2@60,47.75 ; v1(62,46.75) R21.2@62,47.75 ; v1(63.55,50.6) v1@63.6,50.65 ; J2.4@63.55,52.6 63.55,50.7 v1@63.6,50.65 ; C5.1@64.25,49.25 64.25,49.9 63.6,50.55 v1@63.6,50.65 ; R22.2@66.5,47.75 66.5,47.121 66.786,46.836 66.918,46.836 v1(67.003,46.75) ; v1(68.5,46.75) R23.2@68.5,47.75 ; J3.1@77.808,50.46 J3.1@77.884,50.46
  SIG 1 w0.2: C39.1@2.25,35.5 v1(2.25,34.75) 2.25,33.8 U2.6@2.3,33.75 ; Q1.2@8.25,39.5 v1(9.25,39.5) ; v1(19,35.75) 19,36.7 C37.1@19.05,36.75 ; C29.1@34.2,22.5 34.2,23.2 34.5,23.5 v1(35,23.5) 35.677,23.5 36.177,24 36.854,24 IC1.55@37.584,24.73 ; v1(53.25,28.25) 53.25,27.432 IC1.95@54.184,26.498 55,25.682 55,25.25 C16.1@55.755,24.495 ; IC1.108@58.78,31.094 59.196,30.679 59.266,30.679 59.511,30.923 59.723,30.923 v1(59.8,31) 60.505,30.295 C32.1@60.505,30.245 ; IC1.109@58.78,33.906 59.474,34.6 59.474,35.074 v1(59.9,35.5) 60.3,35.1 60.3,34.7 60.5,34.5 61.745,33.255 C28.1@61.755,33.255